# Altium PCB UI_PCB.PcbDoc (part 1 of 4)
Units mm, origin at the board's own origin, x right, y up, seen from the top; angles counter-clockwise.
Board outline 164.97 x 129.99 mm, 4 copper layers (SIG/PWR1, GND1, GNS2, SIG/PWR2), stack 1.18 mm thick; 237 components, 216 nets, 913 pads, 655 vias.
Unrouted connection lines stored in the file: 177.
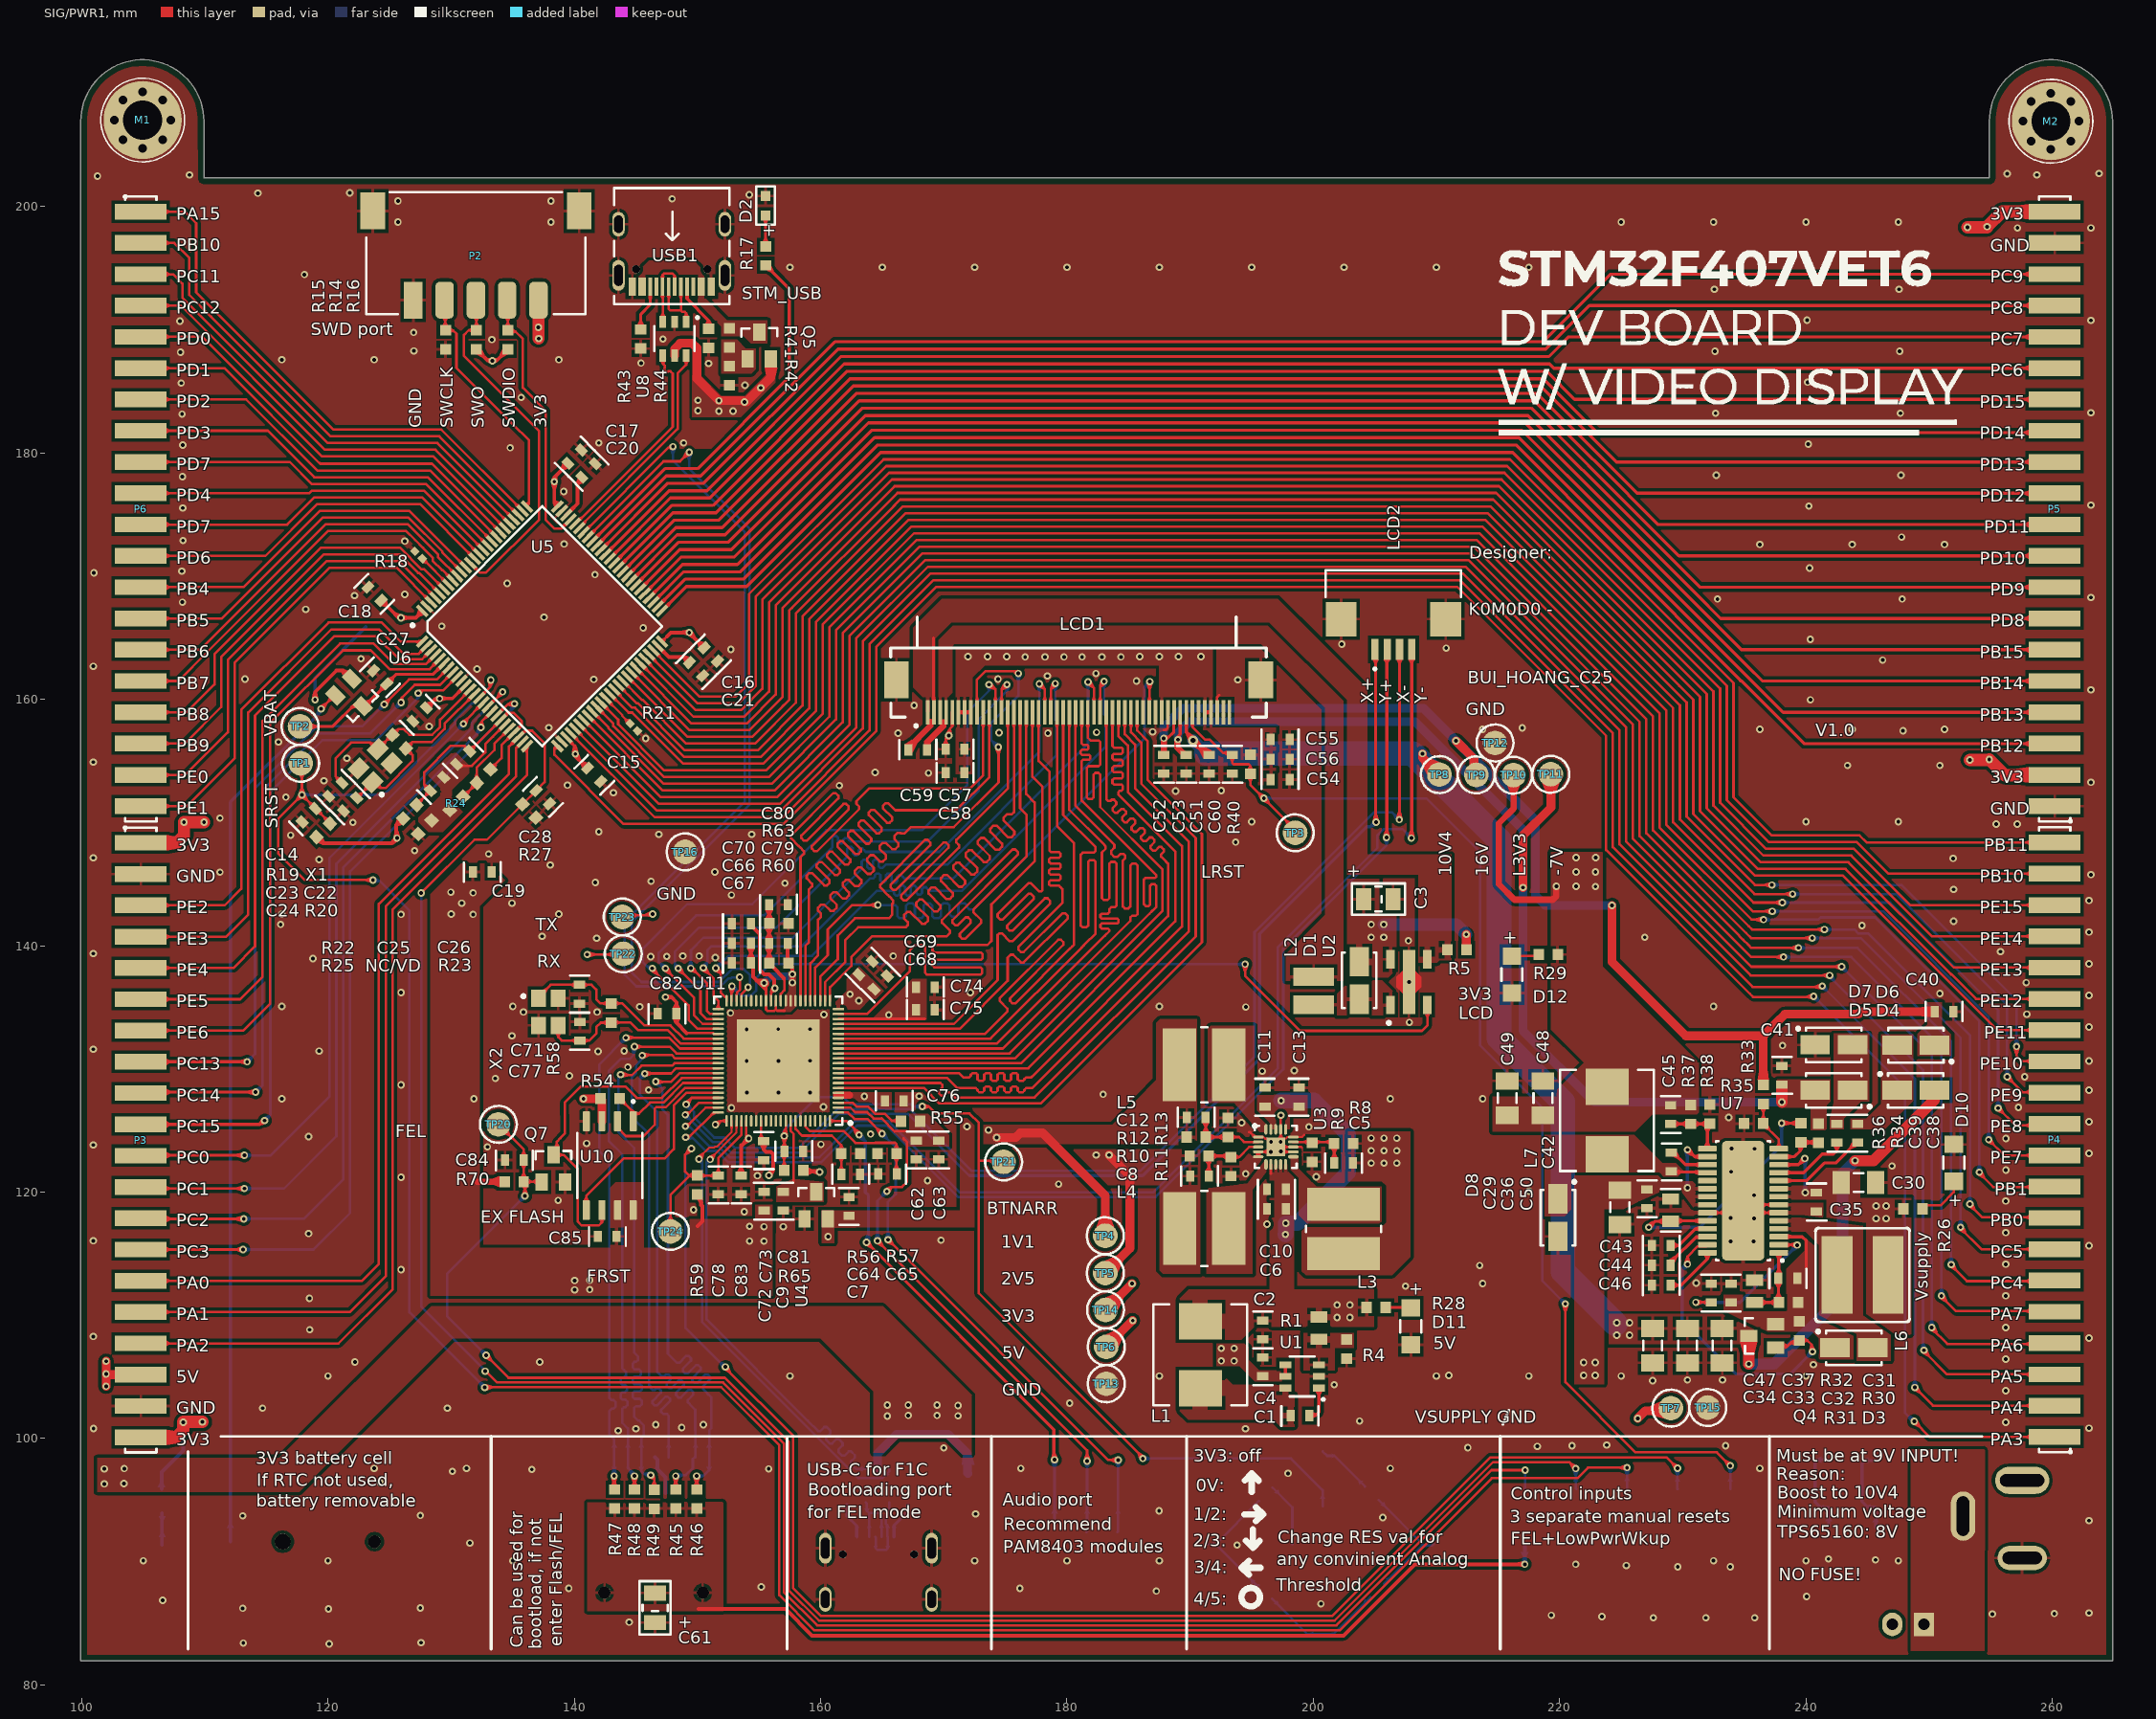
[diagram p0: SIG/PWR1 view]
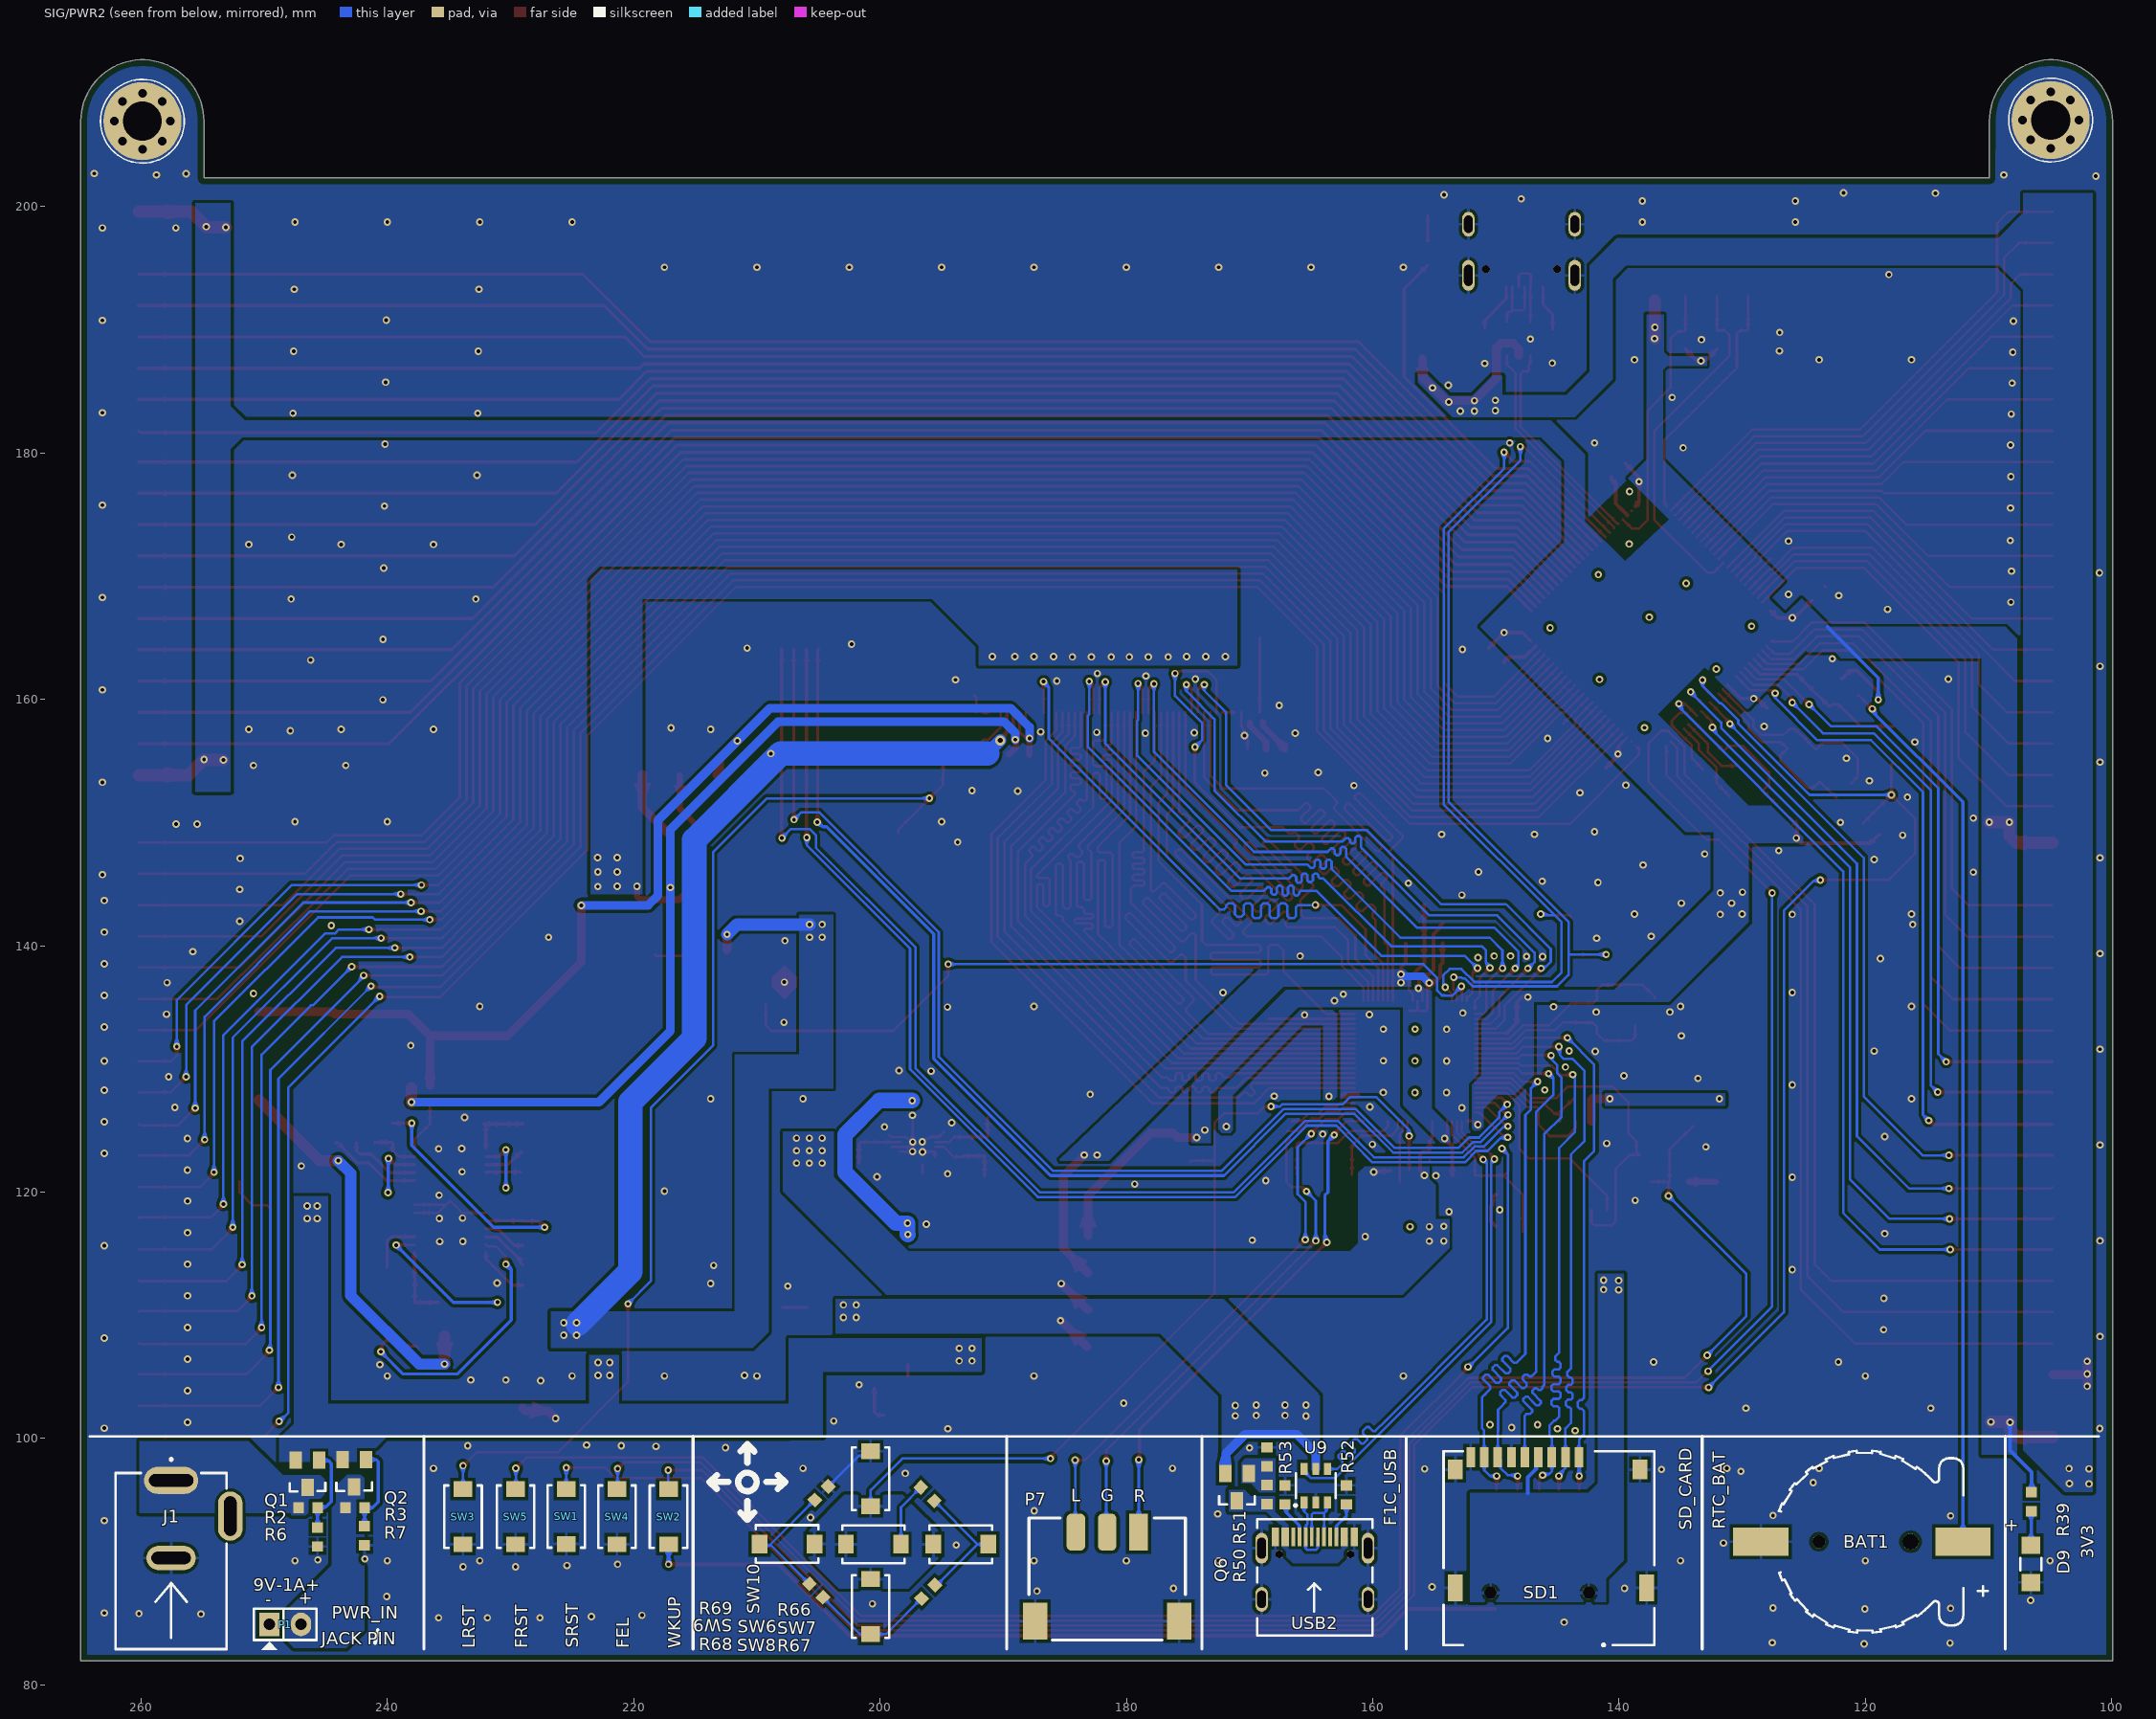
[diagram p1: SIG/PWR2 view, seen from below]
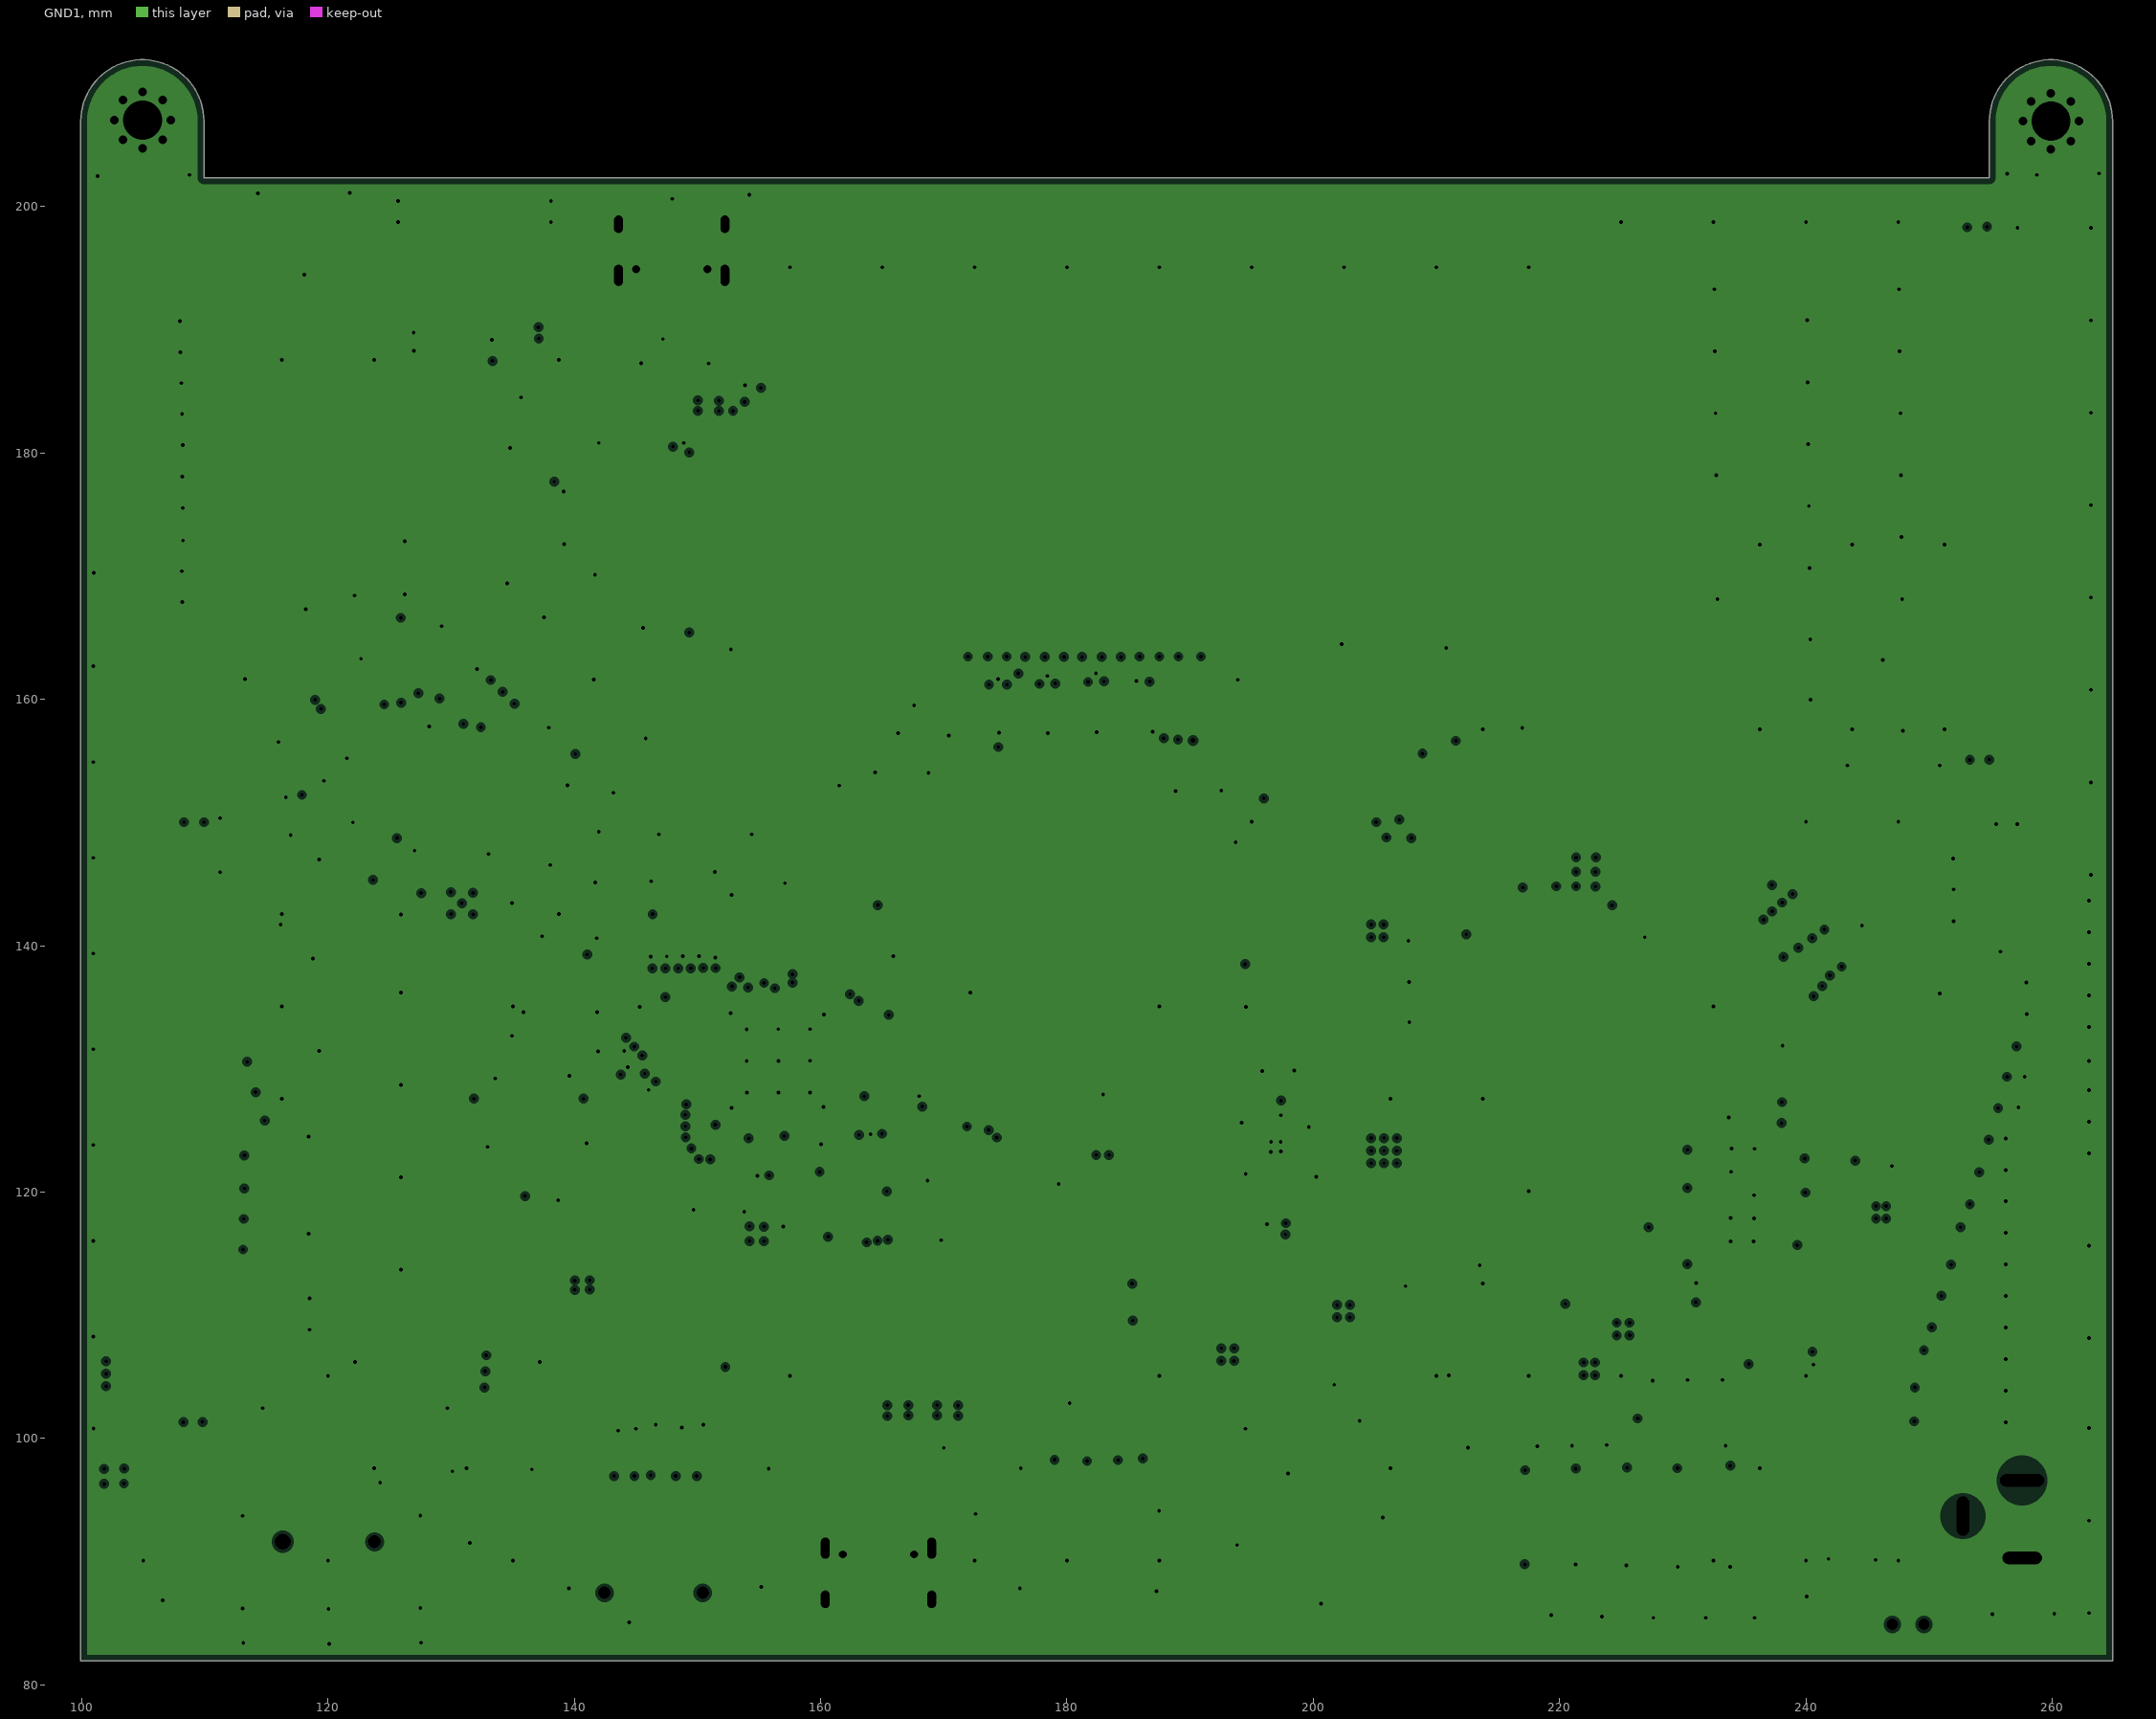
[diagram p2: GND1, clearances drawn from the general rule]
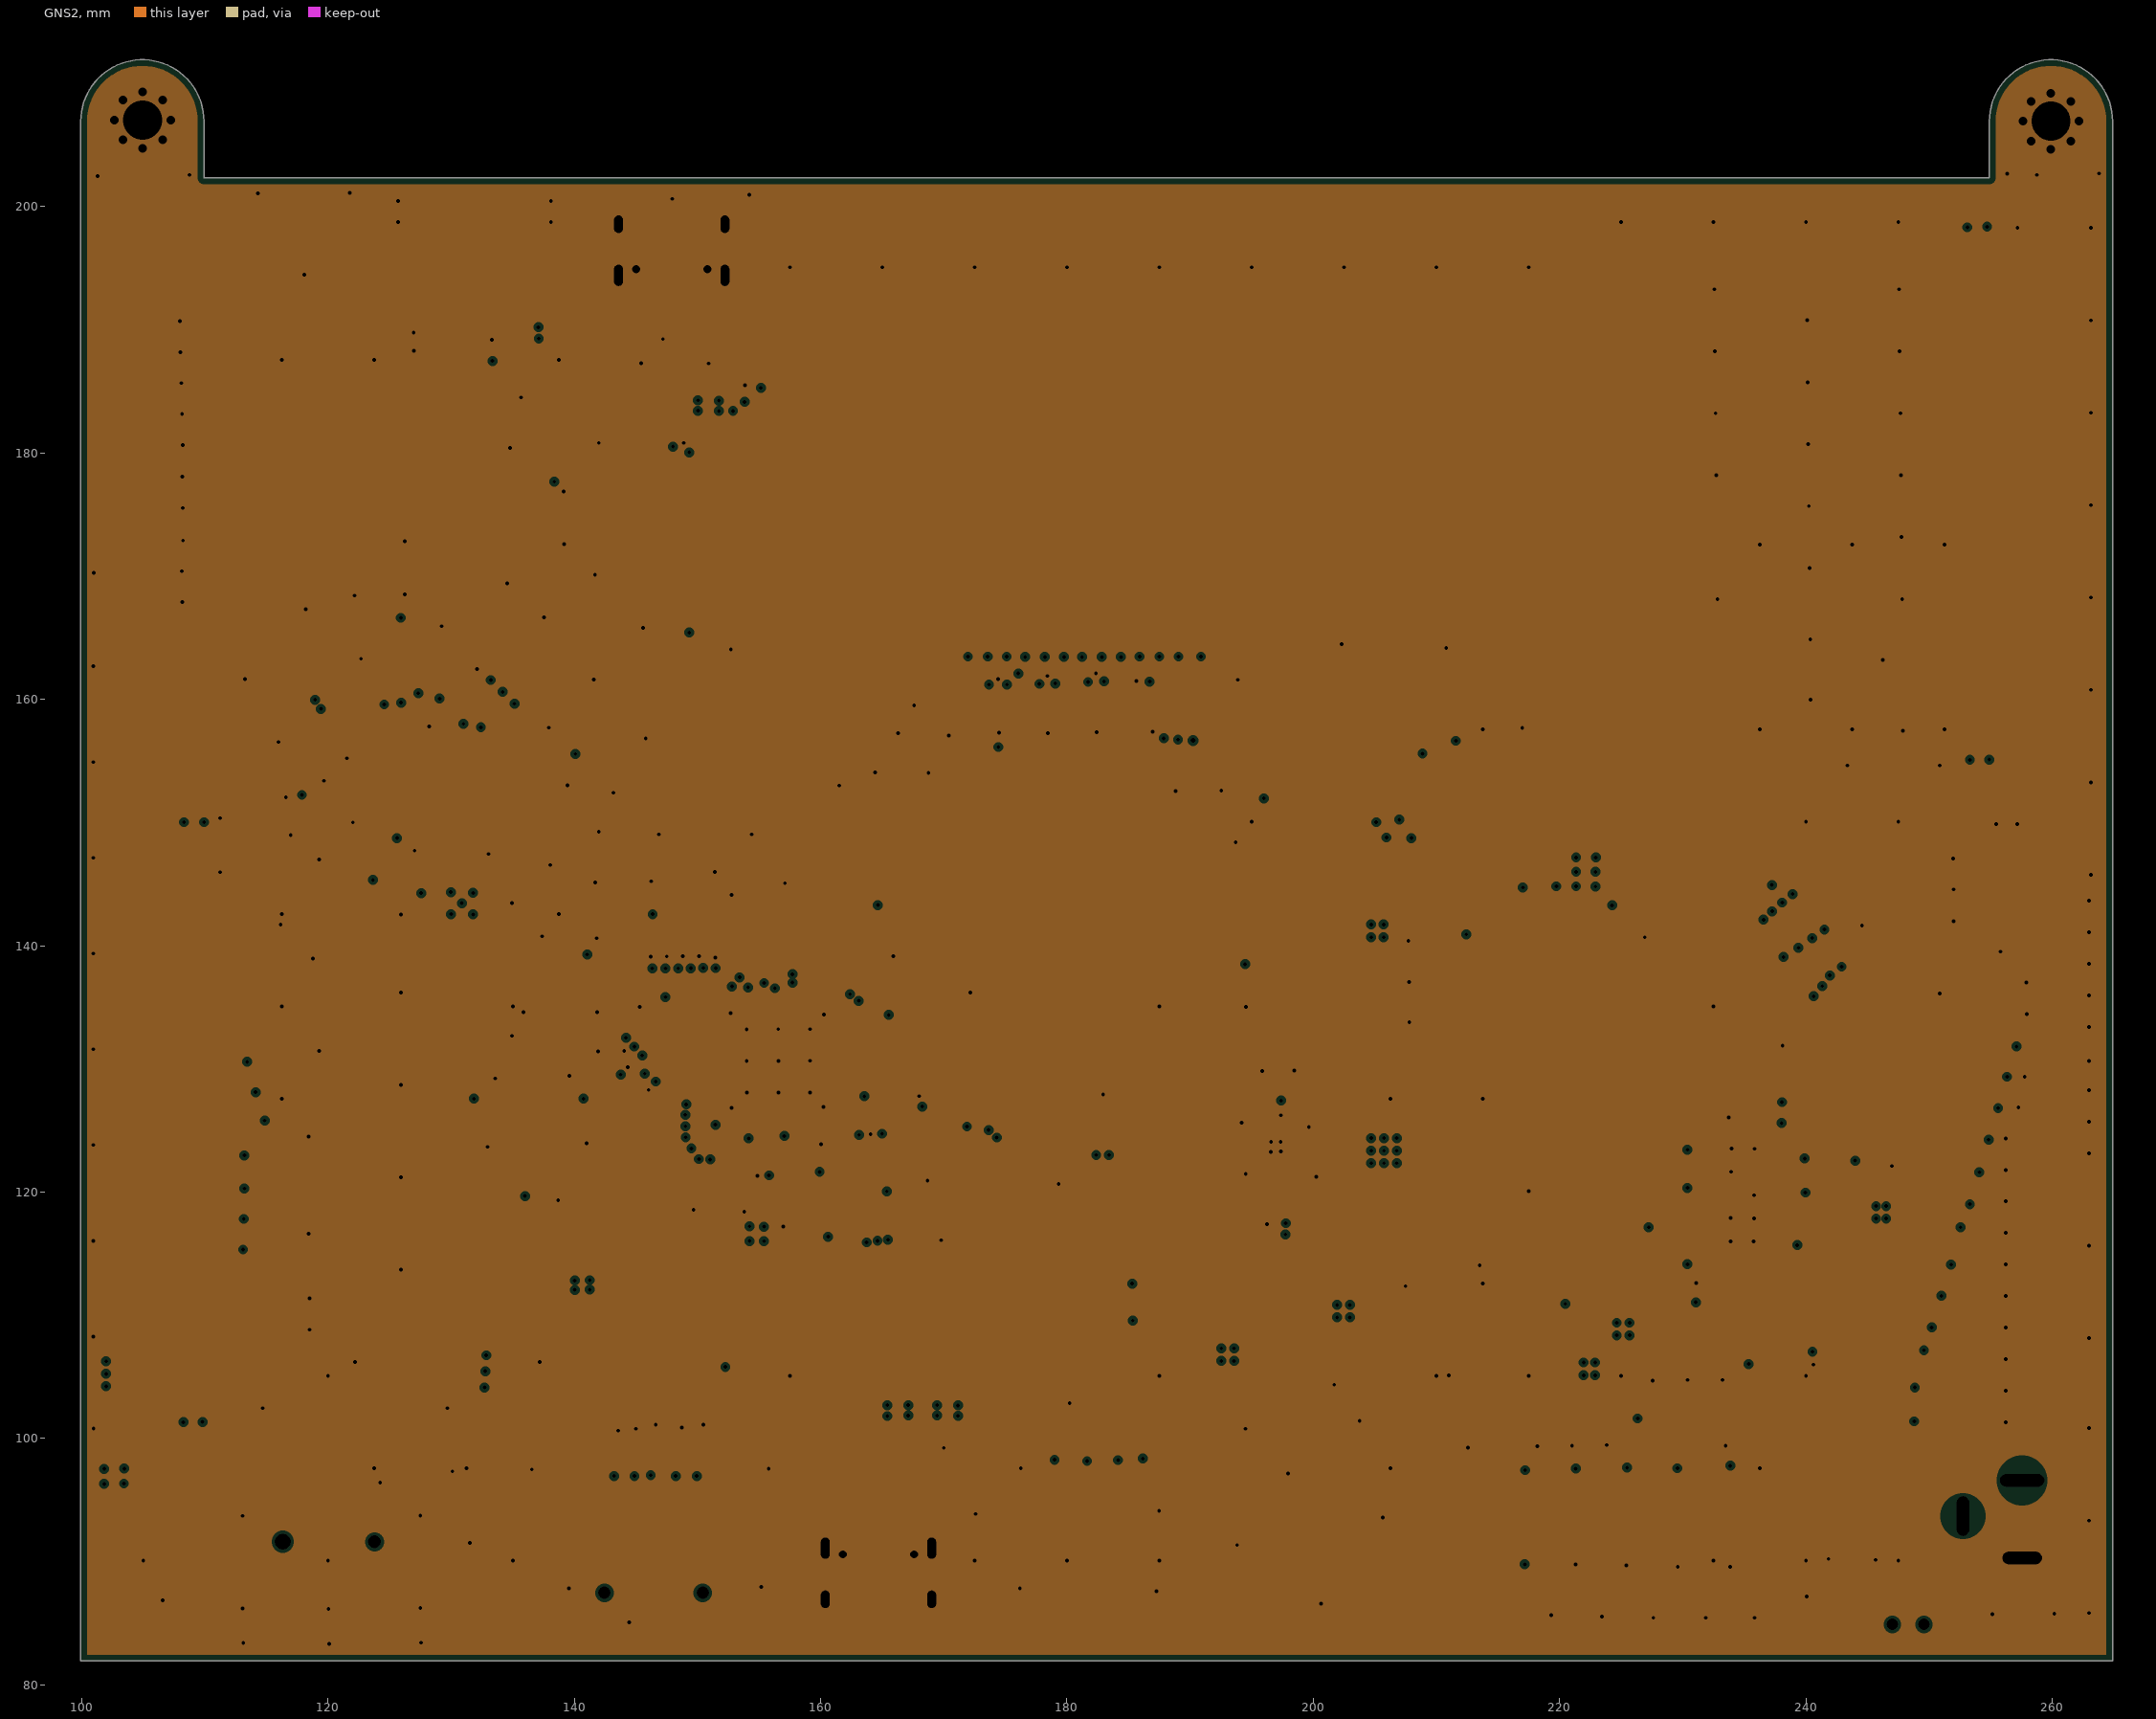
[diagram p3: GNS2, clearances drawn from the general rule]
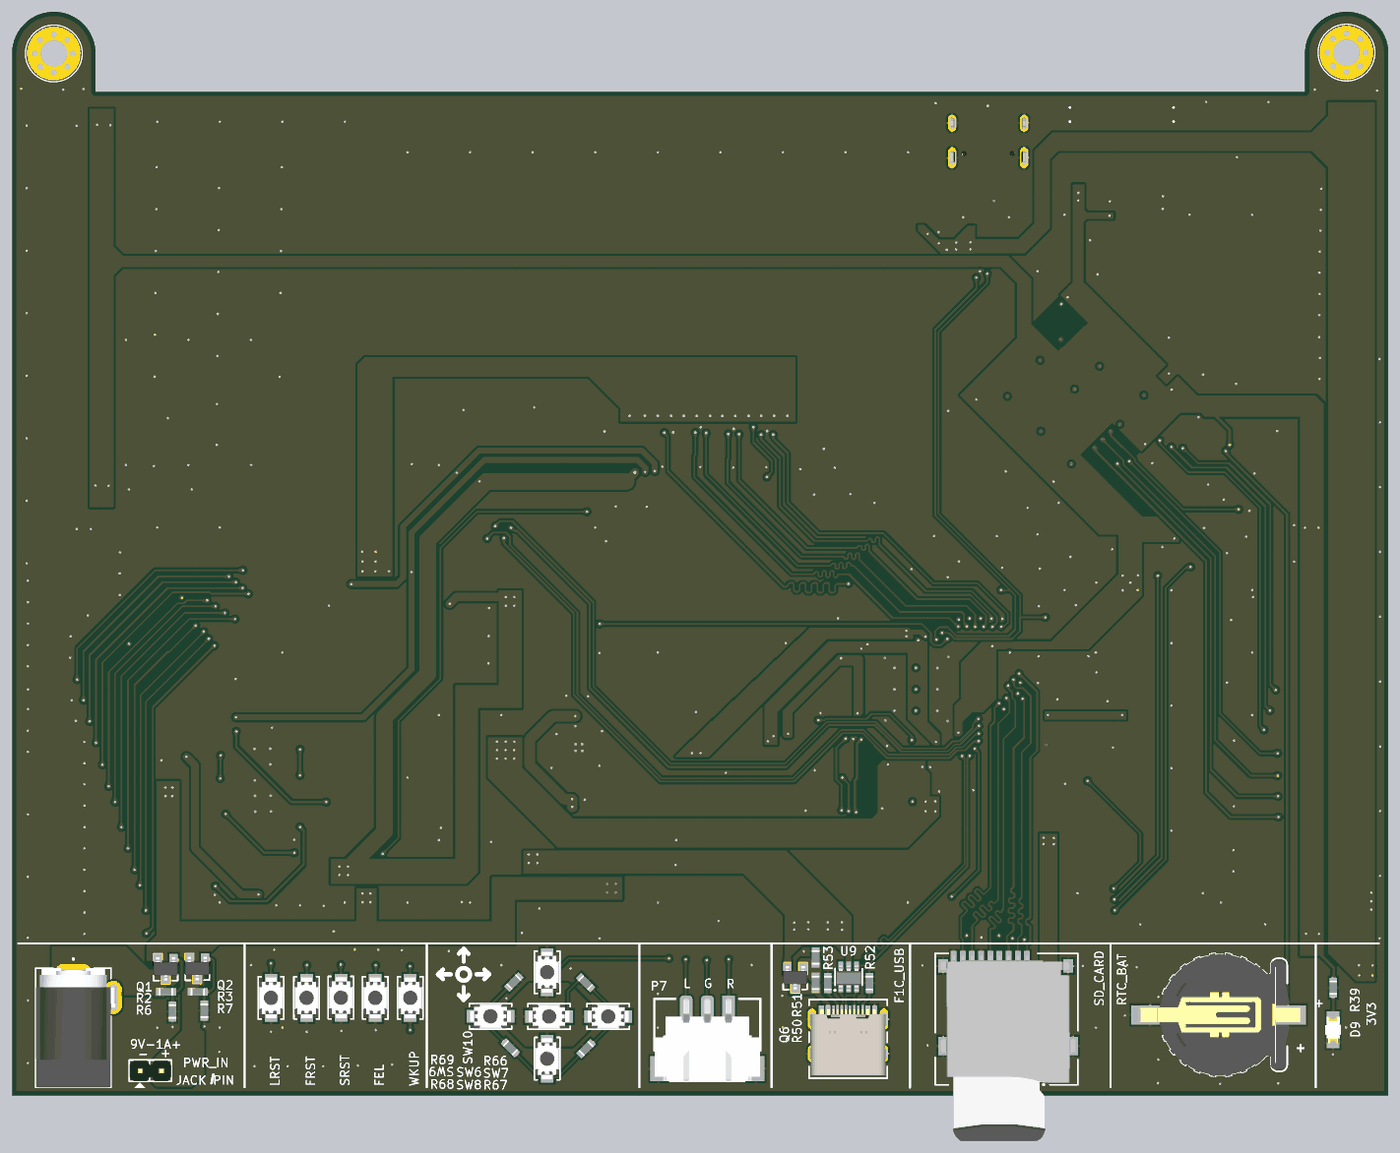
[diagram p7: 3D render of the assembled board from below, using the file's embedded part models]

## Layer stack, top to bottom
Top Solder: solder mask 0.0102, Solder Resist, Dk 3.5
SIG/PWR1: signal copper 0.0356
Dielectric 2: prepreg 0.1148, PP-006, Dk 4.1
GND1: plane copper 0.035, net GND
Dielectric 1: dielectric 0.809, FR-4, Dk 4.8
GNS2: plane copper 0.035, net GND
Dielectric 3: prepreg 0.1148, PP-006, Dk 4.1
SIG/PWR2: signal copper 0.0356
Bottom Solder: solder mask 0.0102, Solder Resist, Dk 3.5

## Board outline
99.924,81.94 99.924,206.908 99.927,206.934 cw(c104.927,206.934) 109.927,206.934 109.927,202.34 109.931,202.336 254.893,202.336 254.893,206.934 cw(c259.893,206.934) 264.893,206.934 264.897,206.934 264.897,81.94

## Design rules (kind name [scope] priority, off if disabled: settings)
BoardOutlineClearance [All] p1: gap=0.508 ignorepadtopadclearanceinfootprint=FALSE except(0: Arc-SplitContinuation Track-SplitContinuation SMDPad-SplitContinuation THPad-SplitContinuation Via-SplitContinuation Fill-SplitContinuation Poly-SplitContinuation Region-SplitContinuation Text-SplitContinuation; 0.254: Arc-OutlineEdge Arc-CavityEdge Arc-CutoutEdge Arc-SplitBarrior)
Clearance CLEAR_PINOUT [InNetClass('PINOUT') vs InNetClass('PINOUT')] p1 off: gap=0.254 ignorepadtopadclearanceinfootprint=TRUE except(0: Arc-Hole Track-Hole SMDPad-Hole THPad-Hole Via-Hole Fill-Hole Poly-Hole Region-Hole; 0.09: SMDPad-SMDPad; 0.15: Arc-Arc Arc-Track Arc-SMDPad Track-SMDPad Text-Text Text-Hole; 0.16: Track-Poly Track-Region SMDPad-Poly SMDPad-Region THPad-Poly THPad-Region Via-Poly Via-Region Fill-Poly Fill-Region Region-Region; 0.2: SMDPad-THPad SMDPad-Via SMDPad-Fill SMDPad-Text; 0.344: Track-Track)
Clearance Clearance_RGB [InNetClass('RGB') vs InNetClass('RGB')] p2: gap=0.254 ignorepadtopadclearanceinfootprint=TRUE except(0: Arc-Hole SMDPad-Hole THPad-Hole Via-Hole Fill-Hole Poly-Hole Region-Hole Text-Hole; 0.15: Track-Hole; 0.16: Track-Region SMDPad-Region THPad-Region Via-Region Fill-Region Region-Region; 0.198: Arc-Arc Arc-Track Arc-SMDPad Track-Track Track-SMDPad SMDPad-SMDPad)
Clearance [All] p3: gap=0.254 ignorepadtopadclearanceinfootprint=FALSE except(0: Arc-Hole Track-Hole SMDPad-Hole THPad-Hole Via-Hole Fill-Hole Poly-Hole Region-Hole; 0.09: SMDPad-SMDPad; 0.15: Arc-Arc Arc-Track Arc-SMDPad Track-Track Track-SMDPad Text-Text Text-Hole; 0.16: Track-Region SMDPad-Region THPad-Region Via-Region Fill-Region Region-Region; 0.2: SMDPad-THPad SMDPad-Via SMDPad-Fill SMDPad-Text)
ComponentClearance [OnTop vs OnBottom] p1: gap=0 collisioncheckmode=3 verticalgap=0 showdistances=FALSE
DiffPairsRouting [InDifferentialPair('USB1')] p1: maxlimit=0.2 minlimit=0.2 mostfreqgap=0.2 toplayer_minwidth=0.199 toplayer_maxwidth=0.199 toplayer_prefwidth=0.199 bottomlayer_minwidth=0.199 bottomlayer_maxwidth=0.199 bottomlayer_prefwidth=0.199 impedanceprofiledriven=TRUE impedanceprofileid={EF08B39C-9AE0-4C3E-9623-010750C874CD} impedanceprofilevalue=90.000000 maxuncoupledlength=12.7
HoleSize [All] p1: absolutevalues=TRUE maxlimit=4 minlimit=0.025 maxpercent=80.000 minpercent=20.000
Length RGB_L [InxSignalClass('RGBx')] p1 off: maxlimit=2539.975 minlimit=0
MatchedLengths SDIO_ML [InxSignalClass('SDIOx')] p1: tolerance=25.4 checknetsindiffpair=FALSE checkdiffpairvsdiffpair=TRUE checkxsignals=TRUE checkothers=TRUE usedelayunits=TRUE delaytolerance=1.000000 targetsourcename=SD_D2_PP1
MatchedLengths USB1_ML [InxSignalClass('USB1x')] p2: tolerance=25.4 checknetsindiffpair=FALSE checkdiffpairvsdiffpair=TRUE checkxsignals=TRUE checkothers=TRUE usedelayunits=TRUE delaytolerance=1.000000 targetsourcename=USB1_N_PP1
MatchedLengths USB2_ML [InxSignalClass('USB2x')] p3: tolerance=25.4 checknetsindiffpair=FALSE checkdiffpairvsdiffpair=TRUE checkxsignals=TRUE checkothers=TRUE usedelayunits=TRUE delaytolerance=1.000000 targetsourcename=USB2_N_PP1
MatchedLengths RGB_ML [InxSignalClass('RGBx')] p4: tolerance=0.25 checknetsindiffpair=FALSE checkdiffpairvsdiffpair=TRUE checkxsignals=TRUE checkothers=TRUE usedelayunits=TRUE delaytolerance=1.000000 targetsourcename=B0_PP1
MinimumSolderMaskSliver [All] p1: minsoldermaskwidth=0.02
PlaneClearance RGC_CLR [InNetClass('RGB')] p1: clearance=0.3
PlaneClearance [All] p2: clearance=0.254
PlaneConnect [All] p1: planeconnectstyle=Direct reliefexpansion=0.127 reliefentries=4 reliefconductorwidth=0.254 reliefairgap=0.127
PolygonConnect [All] p1: connectstyle=Relief reliefconductorwidth=0.254 reliefentries=4 polygonreliefangle="90 Angle" airgapwidth=0.254
ReturnPath RGB_RET [InNetClass('RGB')] p1: impedanceprofileid={5796393A-6458-4536-8C06-EA4A17465277} _gaplimit=0.5 _useantipads=TRUE
RoutingVias [All] p1: holewidth=0.3 width=0.6 viastyle="Through Hole" minholewidth=0.3 minwidth=0.6 maxholewidth=0.711 maxwidth=1.27
SilkToSilkClearance [All] p1: silktosilkclearance=0
SilkToSolderMaskClearance [IsPad] p1: minsilkscreentomaskgap=0.15 clearancetoexposedcopper=TRUE
SolderMaskExpansion [All] p1: expansion=0.025 istentingtop=FALSE
ViasUnderSMD [All] p1: allowed=FALSE
Width SIG_W [InNetClass('SIG')] p1 off: maxlimit=0.2 minlimit=0.2 preferedwidth=0.2 impedanceprofiledriven=TRUE impedanceprofileid={5796393A-6458-4536-8C06-EA4A17465277} impedanceprofilevalue=50.000000 minimp=50.000000 maximp=50.000000 favimp=50.000000
Width [All] p2: maxlimit=5 minlimit=0.15 preferedwidth=0.254 minimp=50.000000 maximp=50.000000 favimp=50.000000
22 further rules are at their usual default settings.

## Classes and differential pairs
net class SWD: SWCLK SWDIO SWO
net class USB_DIFF: USB1_N USB1_P USB2_N USB2_P
net class RGB: B0 B1 B2 B3 B4 B5 B6 B7 G0 G1 G2 G3 G4 G5 G6 G7 LEN LHSYNC LSCK LVSYNC R0 R1 R2 R3 R4 R5 R6 R7
net class PINOUT: PA0 PA1 PA2 PA3 PA4 PA5 PA6 PA7 PA15 PB0 PB1 PB4 PB5 PB6 PB7 PB8 PB9 PB10 PB11 PB12 PB13 PB14 PB15 PC0 PC1 PC2 PC3 PC4 PC5 PC6 PC7 PC8 PC9 PC10 PC11 PC12 PC13 PC14 PC15 PD0 PD1 PD2 PD3 PD4 PD5 PD6 PD7 PD8 PD9 PD10 PD11 PD12 PD13 PD14 PD15 PE0 PE1 PE2 PE3 PE4 PE5 PE6 PE7 PE8 PE9 PE10 PE11 PE12 PE13 PE14 PE15 RX TEST TX
net class SIG: B0 B1 B2 B3 B4 B5 B6 B7 F1C_OSC_IN F1C_OSC_OUT G0 G1 G2 G3 G4 G5 G6 G7 LEN LHSYNC LSCK LVSYNC PRE_USB1_N PRE_USB1_P PRE_USB2_N PRE_USB2_P R0 R1 R2 R3 R4 R5 R6 R7 RX SD_CK SD_CMD SD_D0 SD_D1 SD_D2 SD_D3 SPI_MISO SPI_MOSI SPI_NSS SPI_SCK STM_OSC_IN STM_OSC_OUT SWCLK SWDIO SWO TEST TX
component class UI_MAIN: BAT1 C14 C15 C16 C17 C18 C19 C20 C21 C22 C23 C24 C25 C26 C27 C28 D2 P2 P3 P4 P5 P6 R14 R15 R16 R17 R18 R19 R20 R21 R22 R23 R24 R25 R27 SW1 SW2 TP1 TP2 U5 U6 X1
component class POWER: C1 C2 C3 C4 C5 C6 C7 C8 C9 C10 C11 C12 C13 D1 J1 L1 L2 L3 L4 L5 P1 Q1 Q2 R1 R2 R3 R4 R5 R6 R7 R8 R9 R10 R11 R12 R13 U1 U2 U3 U4
component class LCD: C51 C52 C53 C54 C55 C56 C57 C58 C59 C60 LCD1 R40 SW3 TP3
component class LCD_PWR: C29 C30 C31 C32 C33 C34 C35 C36 C37 C38 C39 C40 C41 C42 C43 C44 C45 C46 C47 C48 C49 C50 D3 D4 D5 D6 D7 D8 D9 D10 D11 D12 L6 L7 Q4 R26 R28 R29 R30 R31 R32 R33 R34 R35 R36 R37 R38 R39 U7
component class F1C100s: C62 C63 C64 C65 C66 C67 C68 C69 C70 C71 C72 C73 C74 C75 C76 C77 C78 C79 C80 C81 C82 C83 C84 C85 Q7 R54 R55 R56 R57 R58 R59 R60 R63 R65 R66 R67 R68 R69 R70 SW4 SW5 SW6 SW7 SW8 SW9 SW10 TP20 TP21 TP22 TP23 TP24 U10 U11 X2
component class CONNS: C61 LCD2 M1 M2 P7 Q5 Q6 R41 R42 R43 R44 R45 R46 R47 R48 R49 R50 R51 R52 R53 SD1 TP4 TP5 TP6 TP7 TP8 TP9 TP10 TP11 TP12 TP13 TP14 TP15 TP16 U8 U9 USB1 USB2
differential pair USB2: +USB2_P -USB2_N
differential pair USB1: +USB1_P -USB1_N

## Components (designator, comment, footprint, x,y, rotation, side; value= is the part's Value field where it differs from the comment)
BAT1 "CELL_SOCKET" CELL_SOCKET 120.049,91.618 r90 bottom
C1 "22uF, 50V" C_0603 198.907,101.854 r0 top
C2 "22uF, 50V" C_0603 195.885,108.814 r90 top
C3 "100uF, 50V" C_1206+ 205.181,143.789 r270 top
C4 "22uF, 50V" C_0603 195.885,105.816 r90 top
C5 "18pF, 50V" C_0603 202.463,122.377 r0 top
C6 "10uF, 50V" C_0603 197.002,118.643 r0 top
C7 "1uF, 50V" C_0603 162.306,118.847 r270 top
C8 "18pF, 50V" C_0603 190.754,121.303 r180 top
C9 "1uF, 50V" C_0603 156.972,119.253 r90 top
C10 "10uF, 50V" C_0603 197.002,120.244 r0 top
C11 "10uF, 50V" C_0603 196.088,127.711 r270 top
C12 "18pF, 50V" C_0603 190.5,126.06 r180 top
C13 "1uF, 50V" C_0603 198.831,127.711 r270 top
C14 "0.1uF, 50V" C_0603 127.432,158.775 r45 top
C15 "0.1uF, 50V" C_0603 141.605,153.873 r135 top
C16 "0.1uF, 50V" C_0603 151.079,163.652 r135 top
C17 "0.1uF, 50V" C_0603 140.03,179.705 r225 top
C18 "0.1uF, 50V" C_0603 123.774,168.58 r315 top
C19 "10uF, 50V" C_0603 132.522,145.98 r180 top
C20 "10uF, 50V" C_0603 141.148,178.587 r45 top
C21 "10uF, 50V" C_0603 149.885,162.458 r315 top
C22 "8pF, 50V" C_0603 121.793,151.486 r45 top
C23 "8pF, 50V" C_0603 120.599,152.679 r45 top
C24 "0.1uF, 50V" C_0603 118.44,150.597 r45 top
C25 "10uF, 50V" C_0603 128.854,153.137 r225 top
C26 "0.1uF, 50V" C_0603 130.962,155.27 r45 top
C27 "0,1uF, 50V" C_0603 124.231,161.798 r315 top
C28 "0.1uF, 50V" C_0603 137.439,152.07 r135 top
C29 "22uF, 25V" C_1206 224.892,118.77 r90 top
C30 "22uF, 25V" C_1206 244.272,120.777 r180 top
C31 "22pF, 50V" C_0603 238.531,113.005 r0 top
C32 "22uF, 25V" C_1206 233.197,107.544 r90 top
C33 "22uF, 25V" C_1206 230.378,107.544 r90 top
C34 "22uF, 25V" C_1206 227.559,107.544 r90 top
C35 "1uF, 50V" C_0603 240.843,119.202 r90 top
C36 "1uF, 50V" C_0603 227.076,119.456 r90 top
C37 "0.47F, 50V" C_0603 233.934,111.811 r270 top
C38 "0.47F, 50V" C_0603 244.196,124.777 r270 top
C39 "0.47F, 50V" C_0603 242.519,124.777 r90 top
C40 "0.47F, 50V" C_0603 251.207,134.645 r180 top
C41 "0.47F, 50V" C_0603 238.049,129.489 r90 top
C42 "0.1uF, 50V" C_0603 229.083,122.453 r90 top
C43 "100nF, 50V" C_0603 228.244,115.672 r0 top
C44 "150nF, 50V" C_0603 228.244,114.071 r0 top
C45 "10nF, 50V" C_0603 229.006,126.301 r90 top
C46 "22nF, 50V" C_0603 228.244,112.446 r0 top
C47 "22nF, 50V" C_0603 232.308,111.811 r270 top
C48 "22uF, 25V" C_1206 218.643,127.635 r270 top
C49 "22uF, 25V" C_1206 215.748,127.635 r270 top
C50 "220nF, 50V" C_0805 229.006,118.542 r90 top
C51 "10uF, 50V" C_0603 191.541,154.737 r90 top
C52 "1uF, 50V" C_0603 187.858,154.737 r90 top
C53 "1uF, 50V" C_0603 189.687,154.737 r90 top
C54 "10uF, 50V" C_0603 197.307,153.492 r180 top
C55 "0.1uF, 50V" C_0603 197.307,156.743 r180 top
C56 "0.1uF, 50V" C_0603 197.307,155.143 r180 top
C57 "10uF, 50V" C_0603 170.917,155.956 r0 top
C58 "0.1uF, 50V" C_0603 170.917,154.051 r0 top
C59 "10uF, 50V" C_0603 167.894,155.905 r180 top
C60 "0.1uF, 50V" C_0603 193.421,154.737 r90 top
C61 "0,1uF, 50V" C_1206+ 146.558,86.36 r180 top
C62 "10uF, 50V" C_0603 167.767,123.419 r90 top
C63 "0.1uF, 50V" C_0603 169.596,123.419 r90 top
C64 "0,1uF, 50V" C_0603 162.433,121.437 r180 top
C65 "0,1uF, 50V" C_0603 165.43,121.488 r0 top
C66 "10uF, 50V" C_0603 153.568,140.208 r0 top
C67 "0.1uF, 50V" C_0603 153.568,138.608 r0 top
C68 "10uF, 50V" C_0603 164.871,137.008 r225 top
C69 "0.1uF, 50V" C_0603 163.652,138.201 r225 top
C70 "0.1uF, 50V" C_0603 153.568,141.808 r0 top
C71 "8pF, 50V" C_0603 140.411,136.068 r90 top
C72 "10uF, 50V" C_0603 155.397,119.253 r270 top
C73 "0.1uF, 50V" C_0603 155.372,123.368 r90 top
C74 "10uF, 50V" C_0603 168.504,136.627 r180 top
C75 "0.1uF, 50V" C_0603 168.504,134.798 r180 top
C76 "0.1uF, 50V" C_0603 165.964,127.406 r180 top
C77 "8pF, 50V" C_0603 140.462,133.071 r270 top
C78 "0.1uF, 50V" C_0603 151.689,120.574 r90 top
C79 "0,1uF, 50V" C_0603 156.566,140.183 r0 top
C80 "0,1uF, 50V" C_0603 156.566,143.332 r180 top
C81 "0,1uF, 50V" C_0603 157.81,123.317 r180 top
C82 "0.1uF, 50V" C_0603 147.523,134.493 r0 top
C83 "0.1uF, 50V" C_0603 153.543,120.574 r90 top
C84 "0.1uF, 50V" C_0603 135.128,122.606 r0 top
C85 "0.1uF, 50V" C_0603 142.672,116.408 r0 top
D1 "3A, 500mV" "PKG_SMA (DO-214AC)" 203.733,137.185 r270 top
D2 "Green,  1.8 V" LED_0603 155.524,200.076 r270 top
D3 "3A, 500mV" "PKG_SMA (DO-214AC)" 243.892,107.366 r0 top
D4 "3A, 500mV" "PKG_SMA (DO-214AC)" 248.92,128.27 r0 top
D5 "3A, 500mV" "PKG_SMA (DO-214AC)" 242.265,128.27 r180 top
D6 "3A, 500mV" "PKG_SMA (DO-214AC)" 248.921,131.928 r180 top
D7 "3A, 500mV" "PKG_SMA (DO-214AC)" 242.265,131.953 r0 top
D8 "3A, 500mV" "PKG_SMA (DO-214AC)" 219.862,117.931 r270 top
D9 "Red, 2.6 V" LED_1206 106.553,89.814 r90 bottom
D10 "Red, 2.6 V" LED_1206 252.019,122.377 r270 top
D11 "Red, 2.6 V" LED_1206 207.924,109.118 r90 top
D12 "Red, 2.6 V" LED_1206 216.129,137.668 r90 top
J1 "DC5521" CONN_DC5521 257.555,90.051 r180 bottom
L1 "10uH, 3A" COIL_74 190.83,106.985 r180 top
L2 "68uH, 510mA" COIL_CD32 200.025,136.347 r90 top
L3 "2.2uH, 2A" COIL_CD53 202.463,117.018 r90 top
L4 "2.2uH, 2A" COIL_CD53 191.142,117.043 r0 top
L5 "2.2uH, 2A" COIL_CD53 191.135,130.327 r0 top
L6 "10uH, 2.3A" COIL_CDRH 244.602,113.276 r180 top
L7 "15uH, 3A" COIL_74 223.855,125.994 r180 top
LCD1 "LCD_AT070TN92" CONN_LCD_AT070TN90_NON_ON_PCB 180.542,179.273 r180 top locked
LCD2 "ER-TP070-1" ER-TP070-1 206.502,166.522 r180 top
M1 "MOUNTING_HOLE" HOLES 104.953,207.035 r0 top
M2 "MOUNTING_HOLE" HOLES 259.893,206.934 r0 top
P1 "Header 2" JP2 249.58,84.912 r180 bottom
P2 "Header5" CONN_Header5 132.004,196.901 r0 top
P3 "CONN_20" CONN_20 104.775,124.231 r90 top
P4 "CONN_20" CONN_20 260.223,124.257 r270 top
P5 "CONN_20" CONN_20 260.223,175.463 r270 top
P6 "CONN_20" CONN_20 104.775,175.463 r90 top
P7 "HEADER3" CONN_Header3 181.559,87.503 r270 bottom
Q1 "AO3401" PKG_SOT-23 246.482,97.13 r0 bottom
Q2 "AO3401" PKG_SOT-23 242.697,97.18 r0 bottom
Q4 "AO3401" PKG_SOT-23 236.449,108.331 r90 top
Q5 "AO3401" PKG_SOT-23 155.016,188.722 r0 top
Q6 "AO3401" PKG_SOT-23 171.018,96.063 r0 bottom
Q7 "2SC1815" PKG_SOT-23 138.303,121.92 r0 top
R1 "11 Kohm, 1/16W" R_0805 200.457,108.966 r90 top
R2 "10 KOhm, 1/16W" R_0603 246.443,94.386 r0 bottom
R3 "10 KOhm, 1/16W" R_0603 242.633,94.386 r0 bottom
R4 "1.5 KOhm, 1/16W" R_0603 202.717,107.251 r90 top
R5 "560 Ohm, 1/16W" R_0603 211.671,139.675 r0 top
R6 "1 MOhm, 1/16W" R_0603 245.668,92.011 r90 bottom
R7 "1 MOhm, 1/16W" R_0603 241.858,92.113 r90 bottom
R8 "150 KOhm, 1/16W" R_0603 202.451,123.952 r0 top
R9 "150 KOhm, 1/16W" R_0603 199.898,123.241 r90 top
R10 "470 KOhm, 1/16W" R_0603 190.741,122.929 r180 top
R11 "160 KOhm, 1/16W" R_0603 193.319,122.078 r90 top
R12 "680 KOhm, 1/16W" R_0603 190.487,124.473 r180 top
R13 "150 KOhm, 1/16W" R_0603 193.065,125.248 r270 top
R14 "10 KOhm, 1/16W" R_0603 132.055,189.192 r90 top
R15 "10 KOhm, 1/16W" R_0603 129.54,189.192 r90 top
R16 "10 KOhm, 1/16W" R_0603 134.595,189.192 r90 top
R17 "1 kOhm, 1/16W" R_0603 155.55,196.012 r270 top
R18 "10KOhm, 1/16W" R_0402 127.356,171.729 r315 top
R19 "1 MOhm, 1/16W" R_0603 125.781,156.566 r315 top
R20 "10 KOhm, 1/16W" R_0603 119.609,149.377 r225 top
R21 "10KOhm, 1/16W" R_0402 144.827,157.738 r315 top
R22 "1Ohm, 1/16W" R_0603 126.644,150.876 r45 top
R23 "0 Ohm, 1/16W" R_0603 132.639,153.772 r225 top
R24 "1 MOhm, 1/16W" R_0603 130.429,151.562 r45 top
R25 "1Ohm, 1/16W" R_0603 127.864,149.628 r45 top
R26 "1 KOhm, 1/16W" R_0603 248.691,118.643 r0 top
R27 "10 kOhm, 1/16W" R_0603 136.331,150.943 r135 top
R28 "1 KOhm, 1/16W" R_0603 205.105,110.642 r0 top
R29 "1 KOhm, 1/16W" R_0603 219.075,139.294 r180 top
R30 "47 KOhm, 1/16W" R_0603 238.573,111.049 r0 top
R31 "10 KOhm, 1/16W" R_0603 239.471,108.75 r90 top
R32 "6.2Kohm, 1/16W" R_0805 235.839,111.938 r270 top
R33 "100 KOhm, 1/16W" R_0603 236.537,127.914 r90 top
R34 "75 KOhm, 1/16W" R_0603 241.021,124.79 r90 top
R35 "8.2 KOhm, 1/16W" R_0603 235.762,125.565 r0 top
R36 "13 KOhm, 1/16W" R_0603 239.598,124.816 r270 top
R37 "2 KOhm, 1/16W" R_0603 230.657,126.314 r90 top
R38 "1.2 KOhm, 1/16W" R_0603 232.207,126.34 r270 top
R39 "1 KOhm, 1/16W" R_0603 106.528,94.869 r270 bottom
R40 "10 KOhm, 1/16W" R_0603 194.894,154.737 r90 top
R41 "10 KOhm, 1/16W" R_0603 152.578,189.345 r270 top
R42 "1 MOhm, 1/16W" R_0603 152.578,186.271 r270 top
R43 "10 KOhm, 1/16W" R_0603 145.39,189.255 r270 top
R44 "5.1 KOhm, 1/16W" R_0603 150.901,189.306 r270 top
R45 "10 KOhm, 1/16W" R_0603 148.234,95.085 r270 top
R46 "10 KOhm, 1/16W" R_0603 149.936,95.085 r270 top
R47 "10 KOhm, 1/16W" R_0603 143.281,95.085 r270 top
R48 "10 KOhm, 1/16W" R_0603 144.882,95.085 r270 top
R49 "10 KOhm, 1/16W" R_0603 146.482,95.072 r270 top
R50 "10 KOhm, 1/16W" R_0603 168.58,95.453 r90 bottom
R51 "1 MOhm, 1/16W" R_0603 168.58,98.501 r90 bottom
R52 "10 KOhm, 1/16W" R_0603 162.128,95.428 r90 bottom
R53 "5.1 KOhm, 1/16W" R_0603 167.107,95.428 r90 bottom
R54 "10 KOhm, 1/16W" R_0603 142.9,127.61 r180 top
R55 "0 Ohm" R_0603 167.31,125.755 r180 top
R56 "200 KOhm, 1/16W" R_0603 162.446,123.139 r180 top
R57 "200 KOhm, 1/16W" R_0603 165.379,123.139 r0 top
R58 "1 MOhm, 1/16W" R_0603 143.002,134.544 r90 top
R59 "10 KOhm, 1/16W" R_0603 149.987,120.586 r270 top
R60 "2 KOhm, 1/16W" R_0603 156.604,138.582 r0 top
R63 "2 KOhm, 1/16W" R_0603 156.604,141.808 r180 top
R65 "10 KOhm, 1/16W" R_0603 157.81,121.768 r0 top
R66 "10 KOhm, 1/16W" R_0603 196.139,95.479 r225 bottom
R67 "10 KOhm, 1/16W" R_0603 196.088,87.554 r315 bottom
R68 "10 KOhm, 1/16W" R_0603 205.181,87.655 r45 bottom
R69 "10 KOhm, 1/16W" R_0603 204.749,95.555 r135 bottom
R70 "1KOhm, 1/16W" R_0603 135.115,120.853 r180 top
SD1 "SD_HOLDER" CONN_SD_Holder 145.796,91.643 r0 bottom locked
SW1 "SWSMD" SW_SMD_NOGND 225.476,93.675 r90 bottom
SW2 "SWSMD" SW_SMD_NOGND 217.17,93.65 r270 bottom
SW3 "SWSMD" SW_SMD_NOGND 233.858,93.65 r90 bottom
SW4 "SWSMD" SW_SMD_NOGND 221.361,93.65 r90 bottom
SW5 "SWSMD" SW_SMD_NOGND 229.591,93.65 r90 bottom
SW6 "SWSMD" SW_SMD_NOGND 200.533,91.415 r0 bottom
SW7 "SWSMD" SW_SMD_NOGND 193.446,91.415 r0 bottom
SW8 "SWSMD" SW_SMD_NOGND 200.762,86.36 r90 bottom
SW9 "SWSMD" SW_SMD_NOGND 207.543,91.44 r180 bottom
SW10 "SWSMD" SW_SMD_NOGND 200.762,96.723 r270 bottom
TP1 "TESTPT" TESTPT 117.78,154.813 r0 top
TP2 "TESTPT" TESTPT 117.729,157.81 r0 top
TP3 "TESTPT" TESTPT 198.526,149.174 r0 top
TP4 "TESTPT" TESTPT 183.109,116.459 r0 top
TP5 "TESTPT" TESTPT 183.109,113.436 r0 top
TP6 "TESTPT" TESTPT 183.185,107.442 r0 top
TP7 "TESTPT" TESTPT 229.032,102.464 r0 top
TP8 "TESTPT" TESTPT 210.236,153.899 r0 top
TP9 "TESTPT" TESTPT 213.233,153.873 r0 top
TP10 "TESTPT" TESTPT 216.256,153.848 r0 top
TP11 "TESTPT" TESTPT 219.278,153.924 r0 top
TP12 "TESTPT" TESTPT 214.757,156.464 r0 top
TP13 "TESTPT" TESTPT 183.185,104.445 r0 top
TP14 "TESTPT" TESTPT 183.134,110.439 r0 top
TP15 "TESTPT" TESTPT 232.029,102.514 r0 top
TP16 "TESTPT" TESTPT 148.996,147.625 r0 top
TP20 "TESTPT" TESTPT 133.833,125.501 r0 top
TP21 "TESTPT" TESTPT 174.854,122.453 r0 top
TP22 "TESTPT" TESTPT 143.967,139.344 r90 top
TP23 "TESTPT" TESTPT 143.891,142.342 r90 top
TP24 "TESTPT" TESTPT 147.803,116.815 r0 top
U1 "MT2492" PKG-SOT23-6 199.092,105.039 r180 top
U2 "PT4115" PKG_SOT-89-5 207.766,137.049 r0 top
U3 "EA3036" PKG_QFN-20 196.952,123.673 r0 top
U4 "XC6206-3V" PKG_SOT-23 159.639,118.923 r0 top
U5 "STMF407VET6" PKG_LQFP-100 137.389,165.938 r45 top
U6 "BAT54C" PKG_SOT-23 122.047,160.223 r225 top
U7 "TPS65161" PKG_HTSSOP-28 234.898,119.306 r180 top
U8 "USBLC6-2" PKG-SOT23-6 148.133,189.281 r270 top
U9 "USBLC6-2" PKG-SOT23-6 164.617,96.164 r90 bottom
U10 "W25Q128JVSIQ" PKG_8-SOIC 142.875,122.149 r270 top
U11 "F1C100s" PKG_QFN-88 156.563,130.659 r180 top
USB1 "USB4105-GF-A" CONN_USB-C 147.955,197.282 r90 top locked
USB2 "USB4105-GF-A" CONN_USB-C 164.744,88.24 r270 bottom locked
X1 "25MHz" PKG_TSX-3225 123.85,154.61 r135 top
X2 "24MHz" PKG_TSX-3225 137.871,134.62 r0 top

## Footprints (in the part's own frame and the unit in brackets; to place one, negate y for a bottom-side part, rotate by r counter-clockwise, add the part's x,y. Pads: shape width x height; smd on the part's side, far side on the other; paste and mask are expansions set on the pad)
C_0603 [mm]
  rect 0.66x0.922 smd: 1(-0.762,0) 2(0.762,0)
  silkscreen extent -1.5,-0.81 1.5,0.76, body extent -0.85,-0.45 0.85,0.45, height 0.5
C_0805 [mil]
  rect 35.98x54.41 smd: 1(-36,0) 2(35,0)
  silkscreen extent -68,-32 67,30, body extent -41,-27 41,27, height 24
C_1206 [mm]
  rect 1.4x1.85 smd: 1(-1.397,0) 2(1.397,0)
  silkscreen extent -0.38,-0.76 0.38,0.76, body extent -1.72,-0.92 1.73,0.92, height 1.6
C_1206+ [mm]
  rect 1.8x1.23 smd: 1(0,1.3) 2(0,-1.1)
  silkscreen extent -1.27,-2.06 1.27,2.27, body extent -0.8,-1.5 0.8,1.7, height 1.61
CELL_SOCKET [mm]
  rect 2.3x4.5 smd: N(0,8.425) P(0,-7.975)
  round 1.3 hole 1.3 unplated: ""(0,-3.725)
  round 1.05 hole 1.05 unplated: ""(0,3.725)
  silkscreen extent -7.37,-10 7.37,6.96, body extent -7.37,-9.6 7.37,9.6, height 4.25
COIL_74 [mm]
  rect 3.5x2.95 smd: 1(0.004,2.905) 2(0.004,-2.545)
  silkscreen extent -3.8,-3.92 3.8,4.28, body extent -3.3,-3.42 3.3,3.78, height 5.01
COIL_CD32 [mm] "Precision Wire Wound Inductor, 2-Leads, Body 3,50x3,00mm, IPC Medium Density"
  rect 1.5x3.3 smd: 1(-1.143,0) 2(1.143,0)
  body extent -1.85,-1.6 1.85,1.6, height 2.3
COIL_CD53 [mm]
  rect 2.7x5.9 smd: 1(-2,0) 2(2,0)
  silkscreen extent -0.25,-3.05 0.25,3.05, body extent -2.9,-2.9 2.9,2.9, height 3.9
COIL_CDRH [mm]
  rect 2.5x6.3 smd: 1(-2.075,0) 2(2.075,0)
  silkscreen extent -3.81,-3.81 3.81,3.81, body extent -3,-3 3,3, height 2
CONN_20 [mm]
  rect 1.27x4.2 smd: 01(24.13,-0.025) 02(21.59,-0.025) 03(19.05,-0.025) 04(16.51,-0.025) 05(13.97,-0.025) 06(11.43,-0.025) 07(8.89,-0.025) 08(6.35,-0.025) 09(3.81,-0.025) 10(1.27,-0.025) 11(-1.27,-0.025) 12(-3.81,-0.025) 13(-6.35,-0.025) 14(-8.89,-0.025) 15(-11.43,-0.025) 16(-13.97,-0.025) 17(-16.51,-0.025) 18(-19.05,-0.025) 19(-21.59,-0.025) 20(-24.13,-0.025)
  silkscreen extent -25.36,-1.3 25.45,1.34
CONN_DC5521 [mm]
  oval 4.4x2.2 hole 1 slot 3.6 at 0 deg: 1(0,6.55)
  oval 4x2 hole 1 slot 3.2 at 0 deg: 2(0,0.25)
  oval 2x4 hole 1 slot 3.2 at 90 deg: 3(4.8,3.65)
  silkscreen extent -4.5,-7.15 4.5,8.35, body extent -4.5,-7.15 5.05,7.15, height 11
CONN_Header3 [mm]
  rect 3x1.5 smd: 1(-4.9,2.54)
  rrect50% 3x1.5 smd: 2(-4.9,0) 3(-4.9,-2.54)
  rect 3x2 smd: 4(2.339,-5.842) 4(2.339,5.842)
  silkscreen extent -6.04,-6.35 3.86,6.35, body extent -6.04,-6.34 3.86,6.34, height 5.92
CONN_Header5 [mm]
  rect 1.5x3 smd: 1(-5.08,-4.49)
  rrect50% 1.5x3 smd: 2(-2.54,-4.49) 3(0,-4.49) 4(2.54,-4.49) 5(5.08,-4.49)
  rect 2x3 smd: 6(-8.382,2.749) 6(8.382,2.749)
  silkscreen extent -8.89,-5.63 8.89,4.27, body extent -8.88,-5.63 8.88,4.27, height 5.92
CONN_LCD_AT070TN90_NON_ON_PCB [mm]
  rect 0.3x2 smd: 1(11.85,20.32) 2(11.35,20.32) 3(10.85,20.32) 4(10.35,20.32) 5(9.85,20.32) 6(9.35,20.32) 7(8.85,20.32) 8(8.35,20.32) 9(7.85,20.32) 10(7.35,20.32) 11(6.85,20.32) 12(6.35,20.32) 13(5.85,20.32) 14(5.35,20.32) 15(4.85,20.32) 16(4.35,20.32) 17(3.85,20.32) 18(3.35,20.32) 19(2.85,20.32) 20(2.35,20.32) 21(1.85,20.32) 22(1.35,20.32) 23(0.85,20.32) 24(0.35,20.32) 25(-0.15,20.32) 26(-0.65,20.32) 27(-1.15,20.32) 28(-1.65,20.32) 29(-2.15,20.32) 30(-2.65,20.32) 31(-3.15,20.32) 32(-3.65,20.32) 33(-4.15,20.32) 34(-4.65,20.32) 35(-5.15,20.32) 36(-5.65,20.32) 37(-6.15,20.32) 38(-6.65,20.32) 39(-7.15,20.32) 40(-7.65,20.32) 41(-8.15,20.32) 42(-8.65,20.32) 43(-9.15,20.32) 44(-9.65,20.32) 45(-10.15,20.32) 46(-10.65,20.32) 47(-11.15,20.32) 48(-11.65,20.32) 49(-12.15,20.32) 50(-12.65,20.32)
  rect 2x3 smd: 51(14.39,17.695) 52(-15.19,17.695)
  silkscreen extent -15.64,12.57 14.85,21.52, body extent -84.26,-134.55 80.65,20.69, height 4.92
CONN_SD_Holder [mm]
  rect 0.7x1.6 smd: 1(-2.55,-6.836) 2(-1.45,-6.836) 3(-0.35,-6.836) 4(0.75,-6.836) 5(1.85,-6.836) 6(2.95,-6.836) 7(4.05,-6.836) 8(5.15,-6.836) 9(6.25,-6.836)
  round 1 hole 1: 4(-3.35,4.164) 4(4.63,4.164)
  rect 1.2x2.2 smd: 6(-8.05,3.764) 6(7.48,3.764)
  rect 1.2x1.6 smd: 6(-7.5,-5.836) 6(7.48,-5.836)
  silkscreen extent -8.65,-7.34 8.45,8.5, body extent -8.37,-7.03 7.77,15.13, height 1.95
CONN_USB-C [mm]
  rect 1.5x0.6 smd: A1(-3.773,-3.152) A4(-3.773,-2.352) B1(-3.773,3.248) B4(-3.773,2.448)
  rect 1.5x0.3 smd: A5(-3.773,-1.202) A6(-3.773,-0.202) A7(-3.773,0.298) A8(-3.773,-1.702) B5(-3.773,1.798) B6(-3.773,0.798) B7(-3.773,-0.702) B8(-3.773,1.298)
  oval 2.5x1 hole 0.7 slot 1.7 at 0 deg: SHIELD(-2.856,4.368) SHIELD(-2.856,-4.272)
  round 0.65 hole 0.65 mask+0.102: SHIELD(-2.356,-2.842) SHIELD(-2.356,2.938)
  oval 2x1 hole 0.7 slot 1.4 at 0 deg: SHIELD(1.294,4.368) SHIELD(1.294,-4.272)
  silkscreen extent -5.2,-4.63 4.23,4.74, body extent -4.02,-4.42 3.88,4.52, height 3.24
ER-TP070-1 [mm]
  rect 0.6x1.7 smd: 1(1.5,2.45) 2(0.5,2.45) 3(-0.5,2.45) 4(-1.5,2.45)
  rect 2.5x2.8 smd: S1(4.25,0) S2(-4.25,0)
  silkscreen extent -5.5,-3.95 5.5,4.15, body extent -5.5,-3.95 5.5,2.8, height 2.5
HOLES [mm]
  round 1 hole 0.7: G(-2.286,0) G(-1.616,-1.616) G(-1.616,1.616) G(0,-2.286) G(0,2.286) G(1.616,-1.616) G(1.616,1.616) G(2.286,0)
  round 6.35 hole 3.18: G(0,0)
  silkscreen extent -3.4,-3.4 3.4,3.4
JP2 [mil]
  rect 65x75 hole 36: 1(0,0)
  oval 65x75 hole 36: 2(101,0)
  silkscreen extent -50,-81 150,50, body extent -48,-50 148,48, height 323
LED_0603 [mm] "SMD Mono-color Chip LED, body 1.6x0.8mm"
  rect 0.8x0.8 smd: 1(-0.8,0) 2(0.8,0)
  silkscreen extent -1.57,-0.76 1.52,0.76, body extent -0.8,-0.4 0.8,0.4, height 0.25
LED_1206 [mm] "SMD Mono-color Chip LED, body 3.2x1.6mm"
  rect 1.4x1.5 smd: 1(-1.5,0) 2(1.5,0)
  silkscreen extent -0.5,-0.85 0.5,0.85, body extent -1.6,-0.8 1.6,0.8, height 0.68
PKG-SOT23-6 [mil]
  rect 38.5x22 smd paste+0 mask+0: 1(-53.75,37.4) 2(-53.75,0) 3(-53.75,-37.4) 4(53.75,-37.4) 5(53.75,0) 6(53.75,37.4)
  silkscreen extent -71,-64 40,77, body extent -65,-59 53,59, height 57
PKG_8-SOIC [mm]
  rrect25% 1.61x0.58 smd: 1(-3.605,1.905) 2(-3.605,0.635) 3(-3.605,-0.635) 4(-3.605,-1.905) 5(3.605,-1.905) 6(3.605,-0.635) 7(3.605,0.635) 8(3.605,1.905)
  silkscreen extent -5.31,-2.64 2.64,2.64, body extent -3.95,-2.64 3.95,2.64, height 2.16
PKG_HTSSOP-28 [mm]
  rrect20% 1.5x0.45 smd mask+0: 1(-2.9,4.225) 2(-2.9,3.575) 3(-2.9,2.925) 4(-2.9,2.275) 5(-2.9,1.625) 6(-2.9,0.975) 7(-2.9,0.325) 8(-2.9,-0.325) 9(-2.9,-0.975) 10(-2.9,-1.625) 11(-2.9,-2.275) 12(-2.9,-2.925) 13(-2.9,-3.575) 14(-2.9,-4.225) 15(2.9,-4.225) 16(2.9,-3.575) 17(2.9,-2.925) 18(2.9,-2.275) 19(2.9,-1.625) 20(2.9,-0.975) 21(2.9,-0.325) 22(2.9,0.325) 23(2.9,0.975) 24(2.9,1.625) 25(2.9,2.275) 26(2.9,2.925) 27(2.9,3.575) 28(2.9,4.225)
  rrect20% 3.405x9.717 smd paste+0: 28(0,0)
  silkscreen extent -3.28,-4.85 2.2,4.95, body extent -3.2,-4.85 3.2,4.85, height 1.2
PKG_LQFP-100 [mm]
  rect 1.2x0.32 smd: 1(-7.75,6) 2(-7.75,5.5) 3(-7.75,5) 4(-7.75,4.5) 5(-7.75,4) 6(-7.75,3.5) 7(-7.75,3) 8(-7.75,2.5) 9(-7.75,2) 10(-7.75,1.5) 11(-7.75,1) 12(-7.75,0.5) 13(-7.75,0) 14(-7.75,-0.5) 15(-7.75,-1) 16(-7.75,-1.5) 17(-7.75,-2) 18(-7.75,-2.5) 19(-7.75,-3) 20(-7.75,-3.5) 21(-7.75,-4) 22(-7.75,-4.5) 23(-7.75,-5) 24(-7.75,-5.5) 25(-7.75,-6) 51(7.75,-6) 52(7.75,-5.5) 53(7.75,-5) 54(7.75,-4.5) 55(7.75,-4) 56(7.75,-3.5) 57(7.75,-3) 58(7.75,-2.5) 59(7.75,-2) 60(7.75,-1.5) 61(7.75,-1) 62(7.75,-0.5) 63(7.75,0) 64(7.75,0.5) 65(7.75,1) 66(7.75,1.5) 67(7.75,2) 68(7.75,2.5) 69(7.75,3) 70(7.75,3.5) 71(7.75,4) 72(7.75,4.5) 73(7.75,5) 74(7.75,5.5) 75(7.75,6)
  rect 0.32x1.2 smd: 26(-6,-7.75) 27(-5.5,-7.75) 28(-5,-7.75) 29(-4.5,-7.75) 30(-4,-7.75) 31(-3.5,-7.75) 32(-3,-7.75) 33(-2.5,-7.75) 34(-2,-7.75) 35(-1.5,-7.75) 36(-1,-7.75) 37(-0.5,-7.75) 38(0,-7.75) 39(0.5,-7.75) 40(1,-7.75) 41(1.5,-7.75) 42(2,-7.75) 43(2.5,-7.75) 44(3,-7.75) 45(3.5,-7.75) 46(4,-7.75) 47(4.5,-7.75) 48(5,-7.75) 49(5.5,-7.75) 50(6,-7.75) 76(6,7.75) 77(5.5,7.75) 78(5,7.75) 79(4.5,7.75) 80(4,7.75) 81(3.5,7.75) 82(3,7.75) 83(2.5,7.75) 84(2,7.75) 85(1.5,7.75) 86(1,7.75) 87(0.5,7.75) 88(0,7.75) 89(-0.5,7.75) 90(-1,7.75) 91(-1.5,7.75) 92(-2,7.75) 93(-2.5,7.75) 94(-3,7.75) 95(-3.5,7.75) 96(-4,7.75) 97(-4.5,7.75) 98(-5,7.75) 99(-5.5,7.75) 100(-6,7.75)
  silkscreen extent -7.52,-6.88 6.88,7.62, body extent -8,-8 8,8, height 1.6
PKG_QFN-20 [mm]
  oval 0.85x0.25 smd: 1(-1.425,0.8) 2(-1.425,0.4) 3(-1.425,0) 4(-1.425,-0.4) 5(-1.425,-0.8) 12(1.425,-0.4) 13(1.425,0) 14(1.425,0.4) 15(1.425,0.8)
  oval 0.3x0.85 smd: 6(-0.8,-1.425)
  oval 0.25x0.85 smd: 7(-0.4,-1.425) 8(0,-1.425) 9(0.4,-1.425) 10(0.8,-1.425) 16(0.8,1.425) 17(0.4,1.425) 18(0,1.425) 19(-0.4,1.425) 20(-0.8,1.425)
  oval 0.85x0.3 smd: 11(1.425,-0.8)
  rect 1.5x1.5 smd: 21(0,0)
  silkscreen extent -1.83,-1.7 1.7,1.83, body extent -1.6,-1.6 1.6,1.6, height 0.8
PKG_QFN-88 [mm] "QFN, 88-Leads, Body 10,00x10,00mm, Pitch 0,40mm, Thermal Pad 6,74x6,74mm, IPC Medium Density"
  oval 0.95x0.2 smd: 1(-4.875,4.2) 2(-4.875,3.8) 3(-4.875,3.4) 4(-4.875,3) 5(-4.875,2.6) 6(-4.875,2.2) 7(-4.875,1.8) 8(-4.875,1.4) 9(-4.875,1) 10(-4.875,0.6) 11(-4.875,0.2) 12(-4.875,-0.2) 13(-4.875,-0.6) 14(-4.875,-1) 15(-4.875,-1.4) 16(-4.875,-1.8) 17(-4.875,-2.2) 18(-4.875,-2.6) 19(-4.875,-3) 20(-4.875,-3.4) 21(-4.875,-3.8) 22(-4.875,-4.2) 45(4.875,-4.2) 46(4.875,-3.8) 47(4.875,-3.4) 48(4.875,-3) 49(4.875,-2.6) 50(4.875,-2.2) 51(4.875,-1.8) 52(4.875,-1.4) 53(4.875,-1) 54(4.875,-0.6) 55(4.875,-0.2) 56(4.875,0.2) 57(4.875,0.6) 58(4.875,1) 59(4.875,1.4) 60(4.875,1.8) 61(4.875,2.2) 62(4.875,2.6) 63(4.875,3) 64(4.875,3.4) 65(4.875,3.8) 66(4.875,4.2)
  oval 0.2x0.95 smd: 23(-4.2,-4.875) 24(-3.8,-4.875) 25(-3.4,-4.875) 26(-3,-4.875) 27(-2.6,-4.875) 28(-2.2,-4.875) 29(-1.8,-4.875) 30(-1.4,-4.875) 31(-1,-4.875) 32(-0.6,-4.875) 33(-0.2,-4.875) 34(0.2,-4.875) 35(0.6,-4.875) 36(1,-4.875) 37(1.4,-4.875) 38(1.8,-4.875) 39(2.2,-4.875) 40(2.6,-4.875) 41(3,-4.875) 42(3.4,-4.875) 43(3.8,-4.875) 44(4.2,-4.875) 67(4.2,4.875) 68(3.8,4.875) 69(3.4,4.875) 70(3,4.875) 71(2.6,4.875) 72(2.2,4.875) 73(1.8,4.875) 74(1.4,4.875) 75(1,4.875) 76(0.6,4.875) 77(0.2,4.875) 78(-0.2,4.875) 79(-0.6,4.875) 80(-1,4.875) 81(-1.4,4.875) 82(-1.8,4.875) 83(-2.2,4.875) 84(-2.6,4.875) 85(-3,4.875) 86(-3.4,4.875) 87(-3.8,4.875) 88(-4.2,4.875)
  rect 6.74x6.74 smd: 89(0,0)
  silkscreen extent -5.97,-5.2 5.2,5.2, body extent -5.06,-5.06 5.06,5.06, height 0.85
"PKG_SMA (DO-214AC)" [mm] "Molded Diode, 2-Leads, Body 4.25x2.67mm, IPC Medium Density"
  rect 2.4x1.55 smd: 1(-1.525,0) 2(1.525,0)
  silkscreen extent -2.25,-1.4 3.57,2.53, body extent -2.47,-1.4 2.47,1.4, height 2.29
PKG_SOT-23 [mm]
  rect 1x1.4 smd paste+0 mask+0.102: 1(-0.95,-1.1) 2(0.95,-1.1) 3(0,1.1)
  silkscreen extent -1.45,0.74 1.45,1.42, body extent -1.45,-1.4 1.45,1.4, height 1.25
PKG_SOT-89-5 [mm]
  rect 0.7x1.5 smd: 1(-1.5,-1.85) 3(1.5,-1.85) 4(1.5,1.85) 5(-1.5,1.85)
  rect 1x5.2 smd: 2(0,0)
  SIG/PWR1 region: 1,0.4 1,-0.4 0,-1.4 -1,-0.4 -1,0.4 0,1.4
  body extent -2.25,-2.22 2.25,2.22, height 1.6
PKG_TSX-3225 [mm]
  rect 1.2x1.4 smd: 1(-0.781,1.115) 2(-0.781,-1.085) 3(0.819,-1.085) 4(0.819,1.115)
  silkscreen extent -2.14,1.16 -1.89,1.41, body extent -1.23,-1.58 1.27,1.62, height 0.9
R_0402 [mm]
  rect 0.6x0.55 smd: 1(-0.425,0) 2(0.425,0)
  body extent -0.53,-0.27 0.53,0.28, height 0.4
R_0603 [mm]
  rect 0.85x0.9 smd: 1(-0.775,0) 2(0.775,0)
  body extent -0.85,-0.45 0.85,0.45, height 0.5
R_0805 [mil]
  rect 35.98x54.41 smd: 1(-36,0) 2(35,0)
  body extent -41,-27 41,27, height 24
SW_SMD_NOGND [mil]
  rect 50x60 smd paste+0 mask+0: 1(-88,0) 2(88,0)
  silkscreen extent -100,-60 100,60, body extent -96,-57 96,57, height 79
TESTPT [mm]
  round 2 smd: 1(0,0)
  silkscreen extent -1.5,-1.5 1.5,1.5

## Part data
BAT1: "Battery Holder (CELL_PIN)", Manufacturer 1=N/a, Datasheet=N/a, Manufacturer Part Number 1=N/a, Supplier 1=thegioiic, Supplier Link=https://www.thegioiic.com/de-pin-cr2032-3v-xuyen-lo
C1 C2 C4 C5 C6 C7 C8 C9 C10 C11 C12 C13 C14 C15 C16 C17 C18 C19 C20 C21 C22 C23 C24 C25 C26 C27 C28 C31 C35 C36 C37 C38 C39 C40 C41 C42 C43 C44 C45 C46 C47 C51 C52 C53 C54 C55 C56 C57 C58 C59 C60 C62 C63 C64 C65 C66 C67 C68 C69 C70 C71 C72 C73 C74 C75 C76 C77 C78 C79 C80 C81 C82 C83 C84 C85: library part CAP_0603, "CAP_0603", Manufacturer 1=Vishay, Manufacturer Part Number 1=CAP0603, Package=0603, Datasheet=https://www.mouser.de/datasheet/2/447/PYu_RC_Group_51_RoHS_L_11-1984063.pdf, Supplier 1=Thegioiic, Supplier Link=N/a
C3 C61: library part CAP+1206, "CAP+1206", Manufacturer 1=OEM, Manufacturer Part Number 1=N/a, Package=1206, Datasheet=N/a, Supplier 1=Thegioiic, Supplier Link=N/a
C29 C30 C32 C33 C34 C48 C49: library part CAP_1206, "CAP_1206", Manufacturer 1=Vishay, Manufacturer Part Number 1=CAP0805, Package=1206, Datasheet=https://www.mouser.de/datasheet/2/447/PYu_RC_Group_51_RoHS_L_11-1984063.pdf, Supplier 1=Thegioiic, Supplier Link=N/a
C50: library part CAP_0805, "CAP_0805", Manufacturer 1=Vishay, Manufacturer Part Number 1=CAP0805, Package=0805, Datasheet=https://www.mouser.de/datasheet/2/447/PYu_RC_Group_51_RoHS_L_11-1984063.pdf, Supplier 1=Thegioiic, Supplier Link=N/a
D1 D3 D4 D5 D6 D7 D8: library part SCHOTTKY, "SS34", Manufacturer 1=OEM, Manufacturer Part Number 1=N/a, Package=DO-214AC, ComponentLink1Description=Datasheet, ComponentLink1URL=https://www.vishay.com/doc?89055, Datasheet=N/a, Supplier 1=Thegioiic, Supplier Link=N/a
D2: library part GREEN, "Green LED", Manufacturer 1=LITE-ON, Manufacturer Part Number 1=LEDG, Package=1206, ComponentLink1Description="Datasheet link", ComponentLink1URL=N/A, ComponentLink2Description="Supplier 1 URL", ComponentLink2URL=https://www.mouser.vn/ProductDetail/Broadcom-Avago/HSMG-C170?qs=YDL0qNrpDT4lm8ArMPkMEA%3D%3D, ComponentLink3Description="Supplier 2 URL", ComponentLink3URL="SML-LXT0805GW-TR Lumex Opto/Components Inc. | Optoelectronics | DigiKey", ComponentLink4Description="Supplier 3 URL", ComponentLink4URL=N/A, Datasheet=https://www.mouser.com/datasheet/2/239/LTST-S326KGKFKT-1143909.pdf?srsltid=AfmBOorgg6Gh4PD3T9FRO6Da906Aqdqx3RSjbUQRSIXh-3hATfgAoF8Q, Supplier 1=ICDAYROI, Supplier Link=https://icdayroi.com/led-smd-0805
D9 D10 D11 D12: library part RED, "Red LED", Manufacturer 1=LITE-ON, Manufacturer Part Number 1=LEDR, Package=1206, ComponentLink1Description="Datasheet link", ComponentLink1URL=N/A, ComponentLink2Description="Supplier 1 URL", ComponentLink2URL=https://www.mouser.vn/ProductDetail/ROHM-Semiconductor/SML-H12U8TT86C?qs=HXFqYaX1Q2xs%2F%252BL6XLQEvw%3D%3D, ComponentLink3Description="Supplier 2 URL", ComponentLink3URL=https://www.digikey.com/en/products/detail/liteon/LTST-C171KRKT/386801, ComponentLink4Description="Supplier 3 URL", ComponentLink4URL=https://www.thegioiic.com/led-do-0805-dan-smd-trong-suot-harvatek, Datasheet=https://www.mouser.com/datasheet/2/239/LTST-S326KGKFKT-1143909.pdf?srsltid=AfmBOorgg6Gh4PD3T9FRO6Da906Aqdqx3RSjbUQRSIXh-3hATfgAoF8Q, Supplier 1=ICDAYROI, Supplier Link=https://icdayroi.com/led-smd-0805
J1: "Jack DC", Manufacturer 1=OEM, Datasheet=N/a, Manufacturer Part Number 1=DC5521, Supplier 1=Thegioiic, Supplier Link=https://www.thegioiic.com/dc5521-dau-noi-nguon-dc-cai-5521-han-pcb-kim-2-1mm
L1 L7: library part IN_0630, "IN_0630", Manufacturer 1=OEM, Manufacturer Part Number 1=N/a, Package=0630, ComponentLink1Description=Datasheet, ComponentLink1URL=https://product.tdk.com/system/files/dam/doc/product/inductor/inductor/smd/catalog/inductor_automotive_decoupling_mlz1608_en.pdf?ref_disty=mouser, ComponentLink2Description="Supplier 1 URL", ComponentLink2URL=https://www.mouser.vn/ProductDetail/TDK/MLZ1608M100WTD25?qs=u4%252BEJ9urDATpNhOvJ54DAQ%3D%3D, ComponentLink3Description="Supplier 2 URL", ComponentLink3URL=https://www.digikey.com/en/products/detail/tdk-corporation/MLZ1608M100WTD25/4743176, ComponentLink4Description="Supplier 3 URL", Datasheet=N/a, Supplier 1=Thegioiic, Supplier Link=N/a
L2: library part IN_CD32, "IN_CD32", Manufacturer 1=OEM, Manufacturer Part Number 1=N/a, Package=CD32, ComponentLink1Description=Datasheet, ComponentLink1URL=https://product.tdk.com/system/files/dam/doc/product/inductor/inductor/smd/catalog/inductor_automotive_decoupling_mlz1608_en.pdf?ref_disty=mouser, ComponentLink2Description="Supplier 1 URL", ComponentLink2URL=https://www.mouser.vn/ProductDetail/TDK/MLZ1608DR10DTD25?qs=u4%252BEJ9urDARQOELDKhLR2A%3D%3D, ComponentLink3Description="Supplier 2 URL", ComponentLink3URL=https://www.digikey.com/en/products/detail/tdk-corporation/MLZ1608DR10DTD25/4743170, ComponentLink4Description="Supplier 3 URL", Datasheet=N/a, Supplier 1=Thegioiic, Supplier Link=N/a
L3 L4 L5: library part IN_CD53, "IN_CD53", Manufacturer 1=OEM, Manufacturer Part Number 1=N/a, Package=CD53, ComponentLink1Description=Datasheet, ComponentLink1URL=https://product.tdk.com/system/files/dam/doc/product/inductor/inductor/smd/catalog/inductor_automotive_decoupling_mlz1608_en.pdf?ref_disty=mouser, ComponentLink2Description="Supplier 1 URL", ComponentLink2URL=https://www.mouser.vn/ProductDetail/TDK/MLZ1608DR10DTD25?qs=u4%252BEJ9urDARQOELDKhLR2A%3D%3D, ComponentLink3Description="Supplier 2 URL", ComponentLink3URL=https://www.digikey.com/en/products/detail/tdk-corporation/MLZ1608DR10DTD25/4743170, ComponentLink4Description="Supplier 3 URL", Datasheet=N/a, Supplier 1=Thegioiic, Supplier Link=N/a
L6: library part IN_CD104_100, "IN_CD104_100", Manufacturer 1=OEM, Manufacturer Part Number 1=N/a, Package="CD75 7855-100", ComponentLink1Description=Datasheet, ComponentLink1URL=https://product.tdk.com/system/files/dam/doc/product/inductor/inductor/smd/catalog/inductor_automotive_decoupling_mlz1608_en.pdf?ref_disty=mouser, ComponentLink2Description="Supplier 1 URL", ComponentLink2URL=https://www.mouser.vn/ProductDetail/TDK/MLZ1608DR10DTD25?qs=u4%252BEJ9urDARQOELDKhLR2A%3D%3D, ComponentLink3Description="Supplier 2 URL", ComponentLink3URL=https://www.digikey.com/en/products/detail/tdk-corporation/MLZ1608DR10DTD25/4743170, ComponentLink4Description="Supplier 3 URL", Datasheet=N/a, Supplier 1=Thegioiic, Supplier Link=N/a
LCD1: "LCD 7 inch (800 x 3(RGB) x 480) RES / __NOTE THAT THIS IS FFC 50PINS CONN w/ THE LCD FOOTPRINT!__", Connector Part Number="0541325097 (Molex)", Manufacturer 1="INNOLUXDISPLAY Corp.", Manufacturer Part Number 1=AT070TN92, Datasheet=https://mm.digikey.com/Volume0/opasdata/d220001/medias/docus/530/AT070TN92_Jan12_2009_spec.pdf, Supplier 1="Thegioiic (Out of stock)", Supplier Link=https://www.thegioiic.com/lcd-7inch-rbg-800x480-at070tn92-tft-rgb-innolux
LCD2: "7 ”Resistive Touch Panel", Manufacturer 1=EastRising, Datasheet=https://www.buydisplay.com/download/manual/ER-TFT070-2_Datasheet.pdf?srsltid=AfmBOoocyeKFVUV0E77nS_42dAg9JdCzPEYk2mMDtH1qp8-WkBG6DKe6, Manufacturer Part Number 1=ER-TP070-1, Supplier 1=trangiahcm, Supplier Link=https://trangiahcm.com/tam-cam-ung-cong-nghiep-7-0-inch-cap-4-chan-164-100-mm-152-86-mm--1740627184.html
P1: "Header, 2-Pin", LatestRevisionDate=17-Jul-2002, LatestRevisionNote="Re-released for DXP Platform.", Publisher="Altium Limited"
P2: library part HEADER5, "Header 5 pins (2.54mm)", Manufacturer 1=OEM, Manufacturer Part Number 1="XH2.54mm 5", Datasheet=N/a, Supplier 1=Thegioiic, Supplier Link=https://www.thegioiic.com/dau-xh2-54mm-5-chan-dan-smd-nam-ngang
P3 P4 P5 P6: "Header 20 pins (2.54mm)", Manufacturer 1=OEM, Manufacturer Part Number 1=N/a, Datasheet=N/a, Supplier 1=N/a, Supplier Link=N/a
P7: "Header 3 pins (2.54mm", Manufacturer 1=OEM, Manufacturer Part Number 1="XH2.54mm 3", Datasheet=N/a, Supplier 1=Thegioiic, Supplier Link=https://www.thegioiic.com/dau-xh2-54mm-3-chan-dan-smd-nam-ngang
Q1 Q2 Q4 Q5 Q6: "P-Channel 30 V 4A (Ta) 1.4W (Ta) Surface Mount SOT-23-3", Manufacturer 1="Alpha&Omega Semi.", Package=SOT-23, Datasheet=https://www.snapeda.com/parts/AO3401/Alpha%20&%20Omega%20Semiconductor/datasheet/, Manufacturer Part Number 1=AO3401, Supplier 1=ICDayroi, Supplier Link=https://icdayroi.com/ao3401
Q7: "HF Transistor NPN", Manufacturer 1=TOSHIBA, Package=SOT-23, Datasheet=https://media.digikey.com/pdf/Data%20Sheets/Toshiba%20PDFs/2SC1815.pdf, Manufacturer Part Number 1=2SC1815, Supplier 1=Thegioiic, Supplier Link=https://www.thegioiic.com/2sc1815-hf-transistor-npn-50v-0-15a-3-chan-sot-23
R1 R32: library part RES_0805, "RES_0805", Manufacturer 1=Vishay, Manufacturer Part Number 1=RES0805, Package=0805, Acc=5%, Datasheet=https://www.mouser.de/datasheet/2/447/PYu_RC_Group_51_RoHS_L_11-1984063.pdf, Supplier 1=Thegioiic, Supplier Link=N/a
R2 R3 R4 R5 R6 R7 R8 R9 R10 R11 R12 R13 R14 R15 R16 R17 R19 R20 R22 R23 R24 R25 R26 R27 R28 R29 R30 R31 R33 R34 R35 R36 R37 R38 R39 R40 R41 R42 R43 R44 R45 R46 R47 R48 R49 R50 R51 R52 R53 R54 R55 R56 R57 R58 R59 R60 R63 R65 R66 R67 R68 R69 R70: library part RES_0603, "RES_0603", Manufacturer 1=Vishay, Manufacturer Part Number 1=RES0603, Package=0603, Datasheet=https://www.mouser.de/datasheet/2/447/PYu_RC_Group_51_RoHS_L_11-1984063.pdf, Supplier 1=Thegioiic, Supplier Link=N/a
  R2 R3 R4 R11 R14 R15 R16 R17 R20 R22 R25 R26 R27 R28 R29 R31 R35 R38 R39 R40 R41 R43 R44 R45 R46 R47 R48 R49 R50 R52 R53 R54 R55 R56 R57 R59 R65 R66 R67 R68 R69 R70: Acc=5%
  R5 R6 R7 R8 R9 R10 R12 R13 R19 R30 R33 R34 R36 R37 R42 R51 R58 R60 R63: Acc=1%
R18 R21: library part RES_0402, "RES_0402", Manufacturer 1=Vishay, Manufacturer Part Number 1=RES0402, Package=0402, Acc=5%, Datasheet=https://www.mouser.de/datasheet/2/447/PYu_RC_Group_51_RoHS_L_11-1984063.pdf, Supplier 1=Thegioiic, Supplier Link=N/a
SD1: "MICRO SD MEMORY CARD SOCKET", Manufacturer 1=OEM, Manufacturer Part Number 1=MiSD-PP-9P-V1, Package=MicroSD, Datasheet=N/a, Supplier 1=Thegioiic, Supplier Link=https://www.thegioiic.com/misd-pp-9p-v1-khay-the-nho-microsd-9-chan-push-push
SW1 SW2 SW3 SW4 SW5 SW6 SW7 SW8 SW9 SW10: library part SWSMD_NOGND, "SW_SMD", Manufacturer 1=OEM, Manufacturer Part Number 1=N/a, Datasheet=N/a, Supplier 1=Thegioiic, Supplier Link=https://www.thegioiic.com/nut-nhan-3x6mm-cao-3-5mm-4-chan-smd-chinh-ngang
TP1 TP2 TP3 TP4 TP5 TP6 TP7 TP8 TP9 TP10 TP11 TP12 TP13 TP14 TP15 TP16 TP20 TP21 TP22 TP23 TP24: "Test point"
U1: "600KHz, 16V，2A Synchronous / Step-Down Converter", Manufacturer 1=AEROSEMI, Package=SOT23-6, Datasheet=https://images.tuyacn.com/smart/A_TUYA/camera/MT2492.pdf, Manufacturer Part Number 1=MT2492, Supplier 1=linhkienthuduc, Supplier Link=https://linhkienthuduc.com/san-pham/mt2492-ic-nguon-buck-2a/?srsltid=AfmBOoqjhnkSrAs4LOHLVGH4jS9BsyeN6OqcnkH62NuZAXu-ngXV-6yD
U2: "0V, 1.2A Step-down High Brightness / LED Driver with 5000:1 Dimming", Manufacturer 1=PowTech, Datasheet=https://www.microelectronicash.com/downloads/PT4115.pdf, Manufacturer Part Number 1=PT4115, Supplier 1=icdayroi, Supplier Link=https://icdayroi.com/pt4115-pt4115b89e-sot-89-5
U3: "3CH power management IC for applications powered by one Li-Ion battery or a DC 5V adapter.", Manufacturer 1="EVER ANALOG", Package=QFN-20, Datasheet=https://w2.electrodragon.com/Chip-dat/ever-analog-dat/EA3036-dat/EA3036C-datasheet.pdf, Manufacturer Part Number 1=EA3036, Supplier 1=KDE, Supplier Link=https://dientukhaidinh.com/ea3036cqbr-ea3036c-ea3036-3036-qfn-20-ic-quan-ly-nguon-pin-adapter-kde7060
U4: library part XC6206-2.5V, "P-Channel 30 V 4A (Ta) 1.4W (Ta) Surface Mount SOT-23-3", Manufacturer 1=TOREX, Package=SOT-23, Datasheet=https://product.torexsemi.com/system/files/series/xc6206.pdf, Manufacturer Part Number 1=XC6206-3V, Supplier 1=Linhkienthuduc, Supplier Link=https://linhkienthuduc.com/san-pham/ic-nguon-xc6206p302mr-xc6206-3-0v-sot-23/?srsltid=AfmBOorr7RQMQnbRPGlXjibwErwDB5cPHz57D6ns415QwagKLeTO37D5Nio
U5: "Arm® Cortex®-M4 32b MCU+FPU, 210DMIPS, up to 1MB flash/192+4KB RAM, USB / OTG HS/FS, Ethernet, 17 TIMs, 3 ADCs, 15 comm. interfaces, and camera", Manufacturer 1=STMicroelectronics, Package=LQFP-100, Datasheet=https://www.st.com/content/ccc/resource/technical/document/datasheet/ef/92/76/6d/bb/c2/4f/f7/DM00037051.pdf/files/DM00037051.pdf/jcr:content/translations/en.DM00037051.pdf, Manufacturer Part Number 1=STMF407VET6, Supplier 1=Thegioiic, Supplier Link=https://www.thegioiic.com/stm32f407vet6-32-bit-arm-cortex-m4-microcontroller-168mhz-512kb-flash-100-lqfp
U6: "P-Channel 30 V 4A (Ta) 1.4W (Ta) Surface Mount SOT-23-3", Manufacturer 1="ON Semiconductor", Package=SOT-23, Datasheet=https://media.digikey.com/pdf/Data%20Sheets/ON%20Semiconductor%20PDFs/BAT54(A,C,S).pdf, Manufacturer Part Number 1=BAT54C, Supplier 1=thegioiic, Supplier Link=https://www.thegioiic.com/bat54c
U7: "BIAS POWER SUPPLY FOR TV AND MONITOR TFT LCD PANELS", Manufacturer 1=TI, Datasheet=https://www.ti.com/lit/ds/symlink/tps65161.pdf?ts=1780769383696&ref_url=https%253A%252F%252Fwww.google.com%252F, Manufacturer Part Number 1=TPS65161, Supplier 1=shoppee, Supplier Link=https://shopee.vn/5-C%C3%81I-TPS65161PWPR-TSSOP28-TPS65161-TSSOP-28-TPS65161PW-TSSOP-TPS65161PWP-linh-ki%E1%BB%87n-%C4%91i%E1%BB%87n-t%E1%BB%AD-vanxy-i.1274879032.50207449630
U8 U9: "Electrostatic Discharge Protection Device", Manufacturer 1=ST, Datasheet=https://www.st.com/resource/en/datasheet/usblc6-2.pdf, Manufacturer Part Number 1=USBLC6-2, Pkg=SOT23-6, Supplier 1=icdayroi, Supplier Link=https://icdayroi.com/usblc6-2sc6-tvs-diode-5-25v-17v-sot23-6
U10: "FLASH - NOR Memory IC 128Mb (16M x 8) SPI - Quad I/O, QPI, DTR 133 MHz 8-SOIC", Manufacturer 1=Winbond, Package=8-SOIC, Datasheet=https://www.mouser.com/datasheet/2/949/w25q128jv_revf_03272018_plus-1489608.pdf?srsltid=AfmBOoo6A117SgcugjxLlAhFi3KnV-0yeS-felQazvL9ciV6qbD4kAKu, Manufacturer Part Number 1=W25Q128JVSIQ, Supplier 1=icdayroi, Supplier Link=https://icdayroi.com/w25q128jvssiq
U11: "An integrated, low-power ARM9 SoC (System-on-Chip) with 32MB of built-in DDR RAM, widely used for embedded Linux projects, media playback, and retro-gaming consoles.", Manufacturer 1="Allwinner Technology", Package=QFN-88, Datasheet=https://linux-sunxi.org/images/1/11/Allwinner_F1C200s_Datasheet_V1.0.pdf, Manufacturer Part Number 1=F1C100s, Supplier 1=Shoppee, Supplier Link=https://shopee.vn/(1-C%C3%A1i)-chip-%C4%91i%E1%BB%81u-khi%E1%BB%83n-ch%C3%ADnh-ki%E1%BA%BFn-tr%C3%BAc-F1C100-F1C100S-F1C200S-QFN88-QFP128-ARM9-C%C3%B2n-h%C3%A0ng-i.1156302552.41058041933
USB1 USB2: library part USB_C, "USB Type C Receptacle for USB2.0, SMT Type, PCB Top Mount", Manufacturer 1=GCT, Datasheet=https://gct.co/files/specs/usb4105-spec.pdf, Manufacturer Part Number 1=USB4105-GF-A, Supplier 1=Thegioiic, Supplier Link=https://www.thegioiic.com/cong-usb-cai-3-1-type-c-16-chan-thang-dan-smd, Supplier Link 2=https://www.digikey.com/en/products/detail/gct/USB4105-GF-A/11198510
X1: library part XTAL, "Crystal, 25 MHz, -30 to 85 degC, 3.2 x 2.5 x 0.9 mm SMD", Manufacturer 1=EPSON, Manufacturer Part Number 1="TSX-3225 25.0000MF20P-C0", Package=TSX-3225, Datasheet=https://www.epsondevice.com/crystal/en/, Supplier 1=Thegioiic, Supplier Link=https://www.thegioiic.com/thach-anh-25mhz-3225-4-chan-smd
X2: library part XTAL, "Crystal, 24 MHz, -30 to 85 degC, 3.2 x 2.5 x 0.9 mm SMD", Manufacturer 1=EPSON, Manufacturer Part Number 1="TSX-3225 25.0000MF20P-C0", Package=TSX-3225, Datasheet=https://www.epsondevice.com/crystal/en/, Supplier 1=Thegioiic, Supplier Link=https://www.thegioiic.com/thach-anh-24mhz-3225-4-chan-smd
M1 M2: ComponentLink1Description="New link"

## Via types
v1: diameter 0.6, hole 0.3, SIG/PWR1 to SIG/PWR2, tented both sides, 644 vias
v2: diameter 0.6, hole 0.3, SIG/PWR1 to SIG/PWR2, tented bottom, 10 vias
v3: diameter 0.8, hole 0.4, SIG/PWR1 to SIG/PWR2, tented both sides, 1 vias

## Nets (pads, with @x,y where several pads share a name; then routed paths per layer and width w, separated by ;. In a path a pad name is that pad's centre, name@x,y a point inside that pad or via, vN(x,y) a via of type N, cw(c..) or ccw(c..) an arc to the next point about the centre after c; other vN are vias at no path point)
1.1V: C12.2 C68.2 C69.2 C70.2 C83.2 L5.1 R12.2 TP4.1 U11.22 U11.35 U11.71 | length 26.6
  SIG/PWR1 w0.2: C83.2@153.518,121.361 C83.2@153.543,121.336 ; U11.71@153.963,125.784 153.963,124.631 154.102,124.492 v1@154.102,124.384 ; U11.35@155.963,135.534 155.963,136.223 156.286,136.547 v1(156.286,136.55)
  SIG/PWR1 w0.308: C83.2@153.518,121.361 153.53,121.374 153.53,123.812 153.61,123.812 v1(154.157,124.359) ; C70.2@154.33,141.808 154.506,141.632 154.506,141.501 155.067,140.941 155.067,138.039 155.416,137.69 155.807,137.69 156.23,137.267 156.23,136.606 v1(156.286,136.55)
  SIG/PWR1 w0.712: v1(174.295,124.435) 175.837,124.435 176.2,124.797 178.022,124.797 183.109,119.71 TP4.1@183.109,116.459
  other v1: 173.634,125.044 163.093,135.534 162.382,136.068
2.5V: C8.2 C66.2 C67.2 C79.2 L4.1 R10.2 R60.2 TP5.1 U11.30 U11.31 U11.32 U11.34 U11.36 | length 28
  SIG/PWR1 w0.2: v1(155.412,136.982) 155.412,136.874 155.456,136.83 155.563,136.723 U11.36@155.563,135.534 155.563,134.839 155.68,134.722 156.239,134.722 156.363,134.845 ; U11.34@156.363,135.534 156.363,134.845 ; 157.045,134.728 156.48,134.728 156.363,134.845 ; R60.2@157.328,138.634 R60.2@157.353,138.608
  SIG/PWR1 w0.308: C66.2@154.33,140.208 C67.2@154.33,138.608 154.506,138.432 154.506,137.492 154.813,137.185 ; 154.788,137.185 154.813,137.185 ; v1@155.219,136.957 155.507,136.957 v1@155.677,136.957 ; v1@155.356,137.038 v1(155.412,136.982) ; 155.499,136.5 v1@155.169,136.83 ; v1@155.55,137.185 154.813,137.185 ; v1@155.626,136.83 155.456,136.83 v1@155.169,136.83 ; v1@155.626,137.058 154.94,137.058 ; R60.2@157.328,138.634 R60.2@157.328,138.913 ; C79.2@157.328,140.183 R60.2@157.328,138.913 ; R60.2@157.353,138.913 R60.2@157.328,138.913 ; R60.2@157.379,138.582 157.65,138.311 157.65,138.165 157.709,138.106 v1(157.709,137.008) ; 154.813,137.185 154.94,137.058 ; 154.94,137.058 v1@155.169,136.83
  SIG/PWR1 w0.712: TP5.1@183.109,113.436 185.115,115.443 185.115,121.31 v1(183.413,123.012)
  SIG/PWR2 w0.6: v1(155.412,136.982) 155.958,137.528 v1@157.607,137.528
  other v1: 182.372,123.012 157.709,137.693
3V: C9.2 U4.3 U11.80 | length 5.1
  SIG/PWR1 w0.2: U11.80@157.563,125.784 157.563,124.972 157.81,124.724 157.81,120.828